# Allegro board PMOD2BNCSIMPLE_v1_06_65mil_cheap.brd
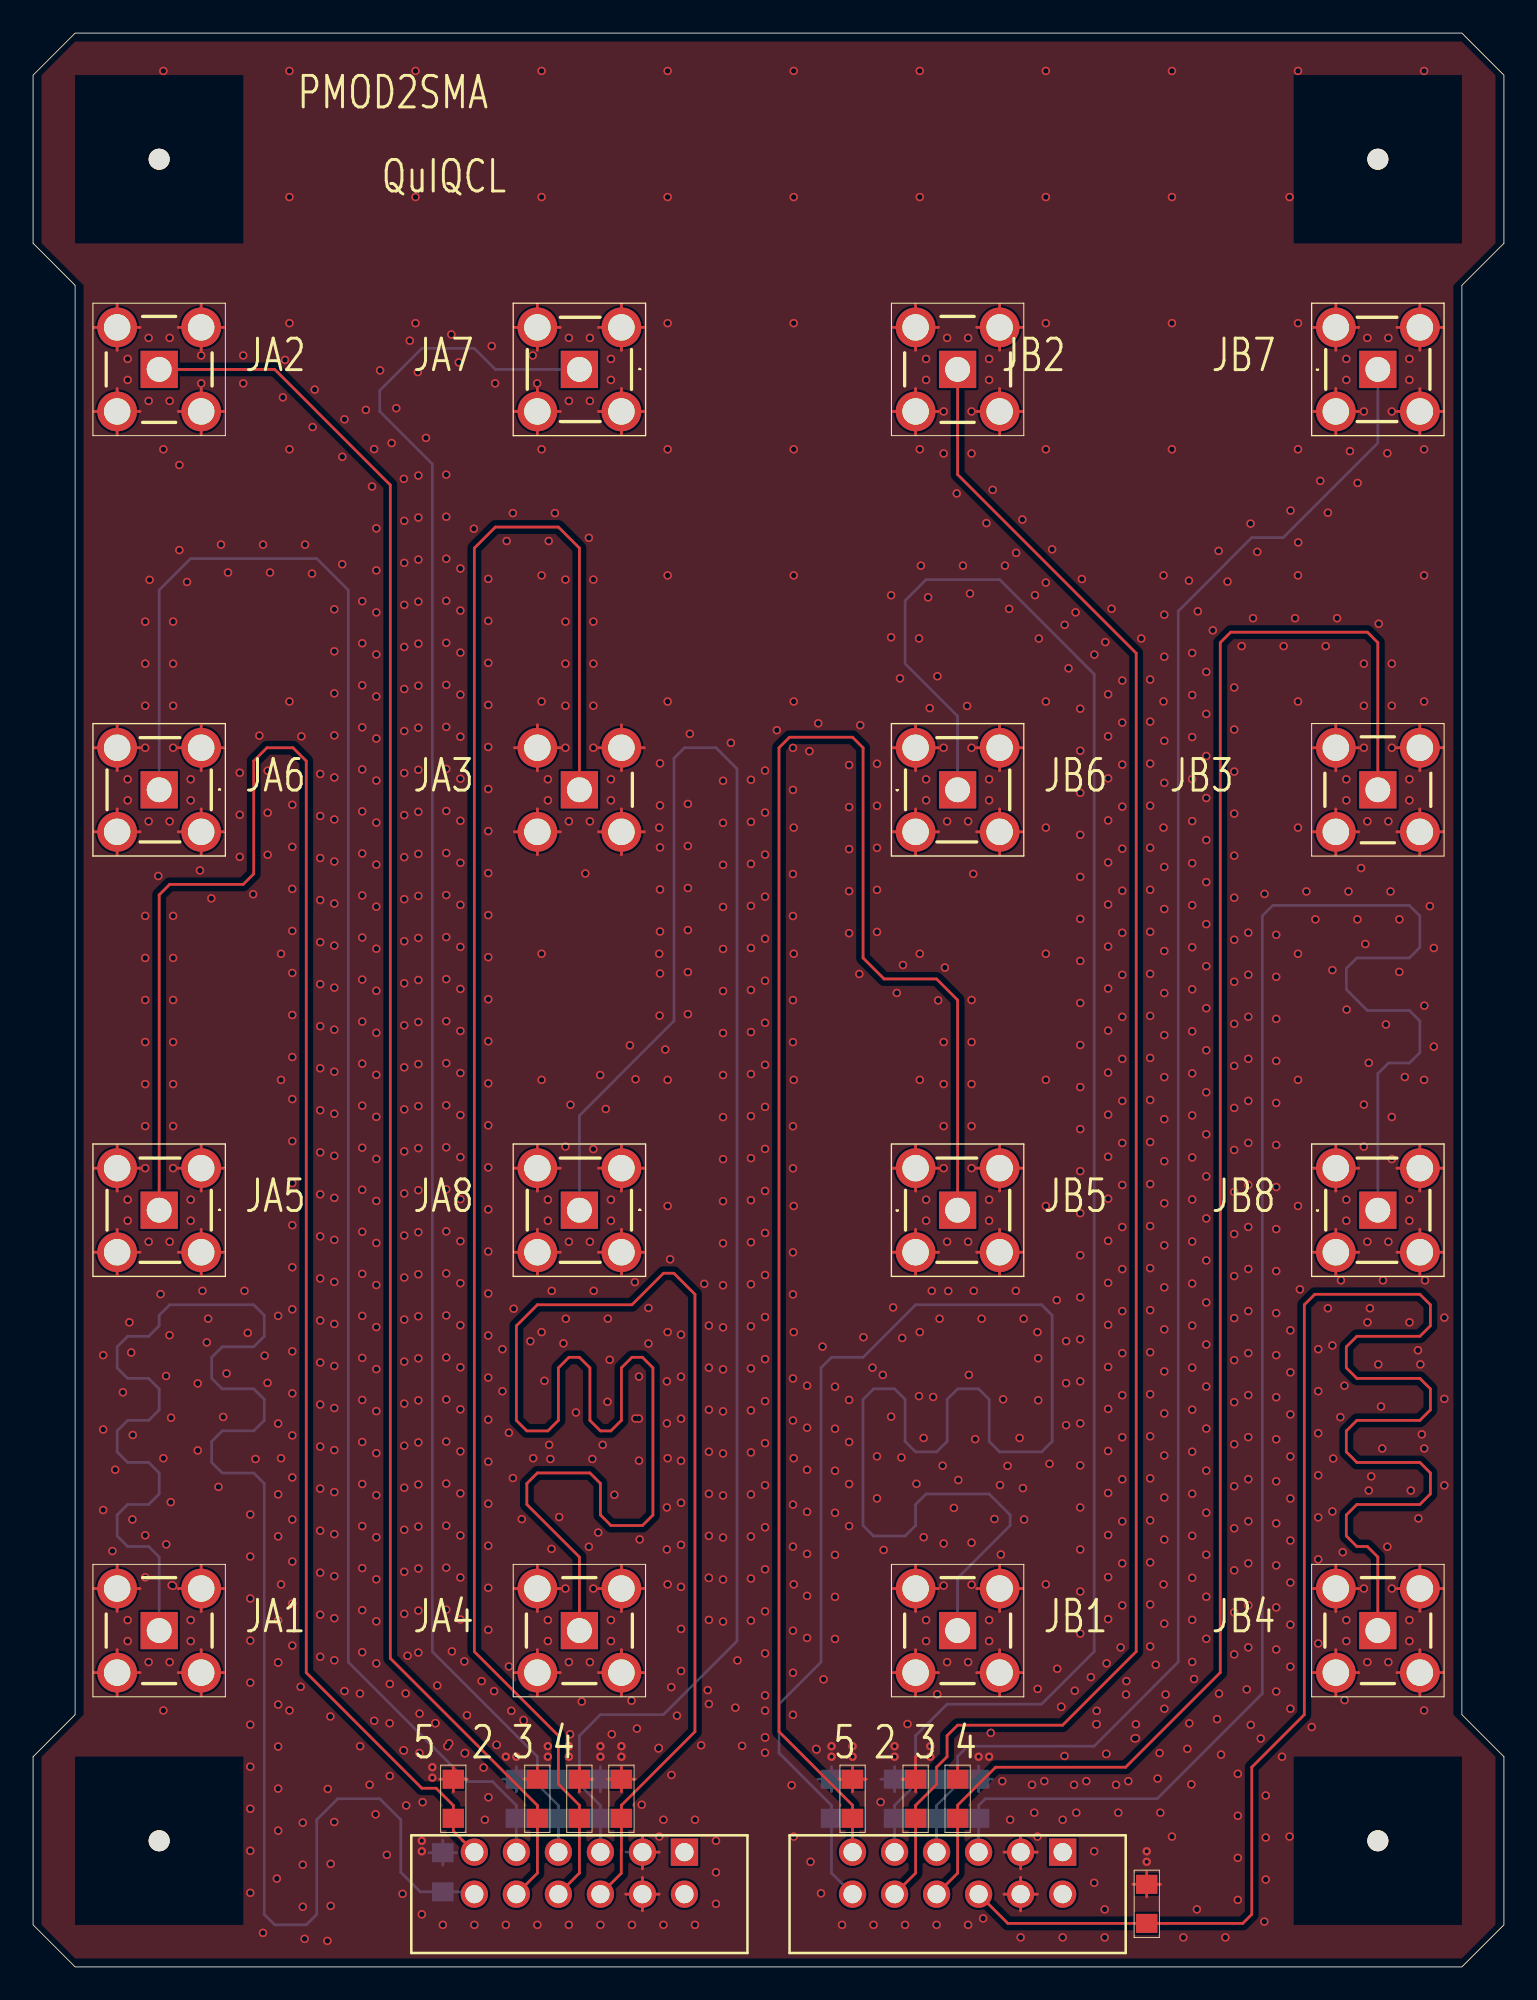
[diagram p0: board, top side]
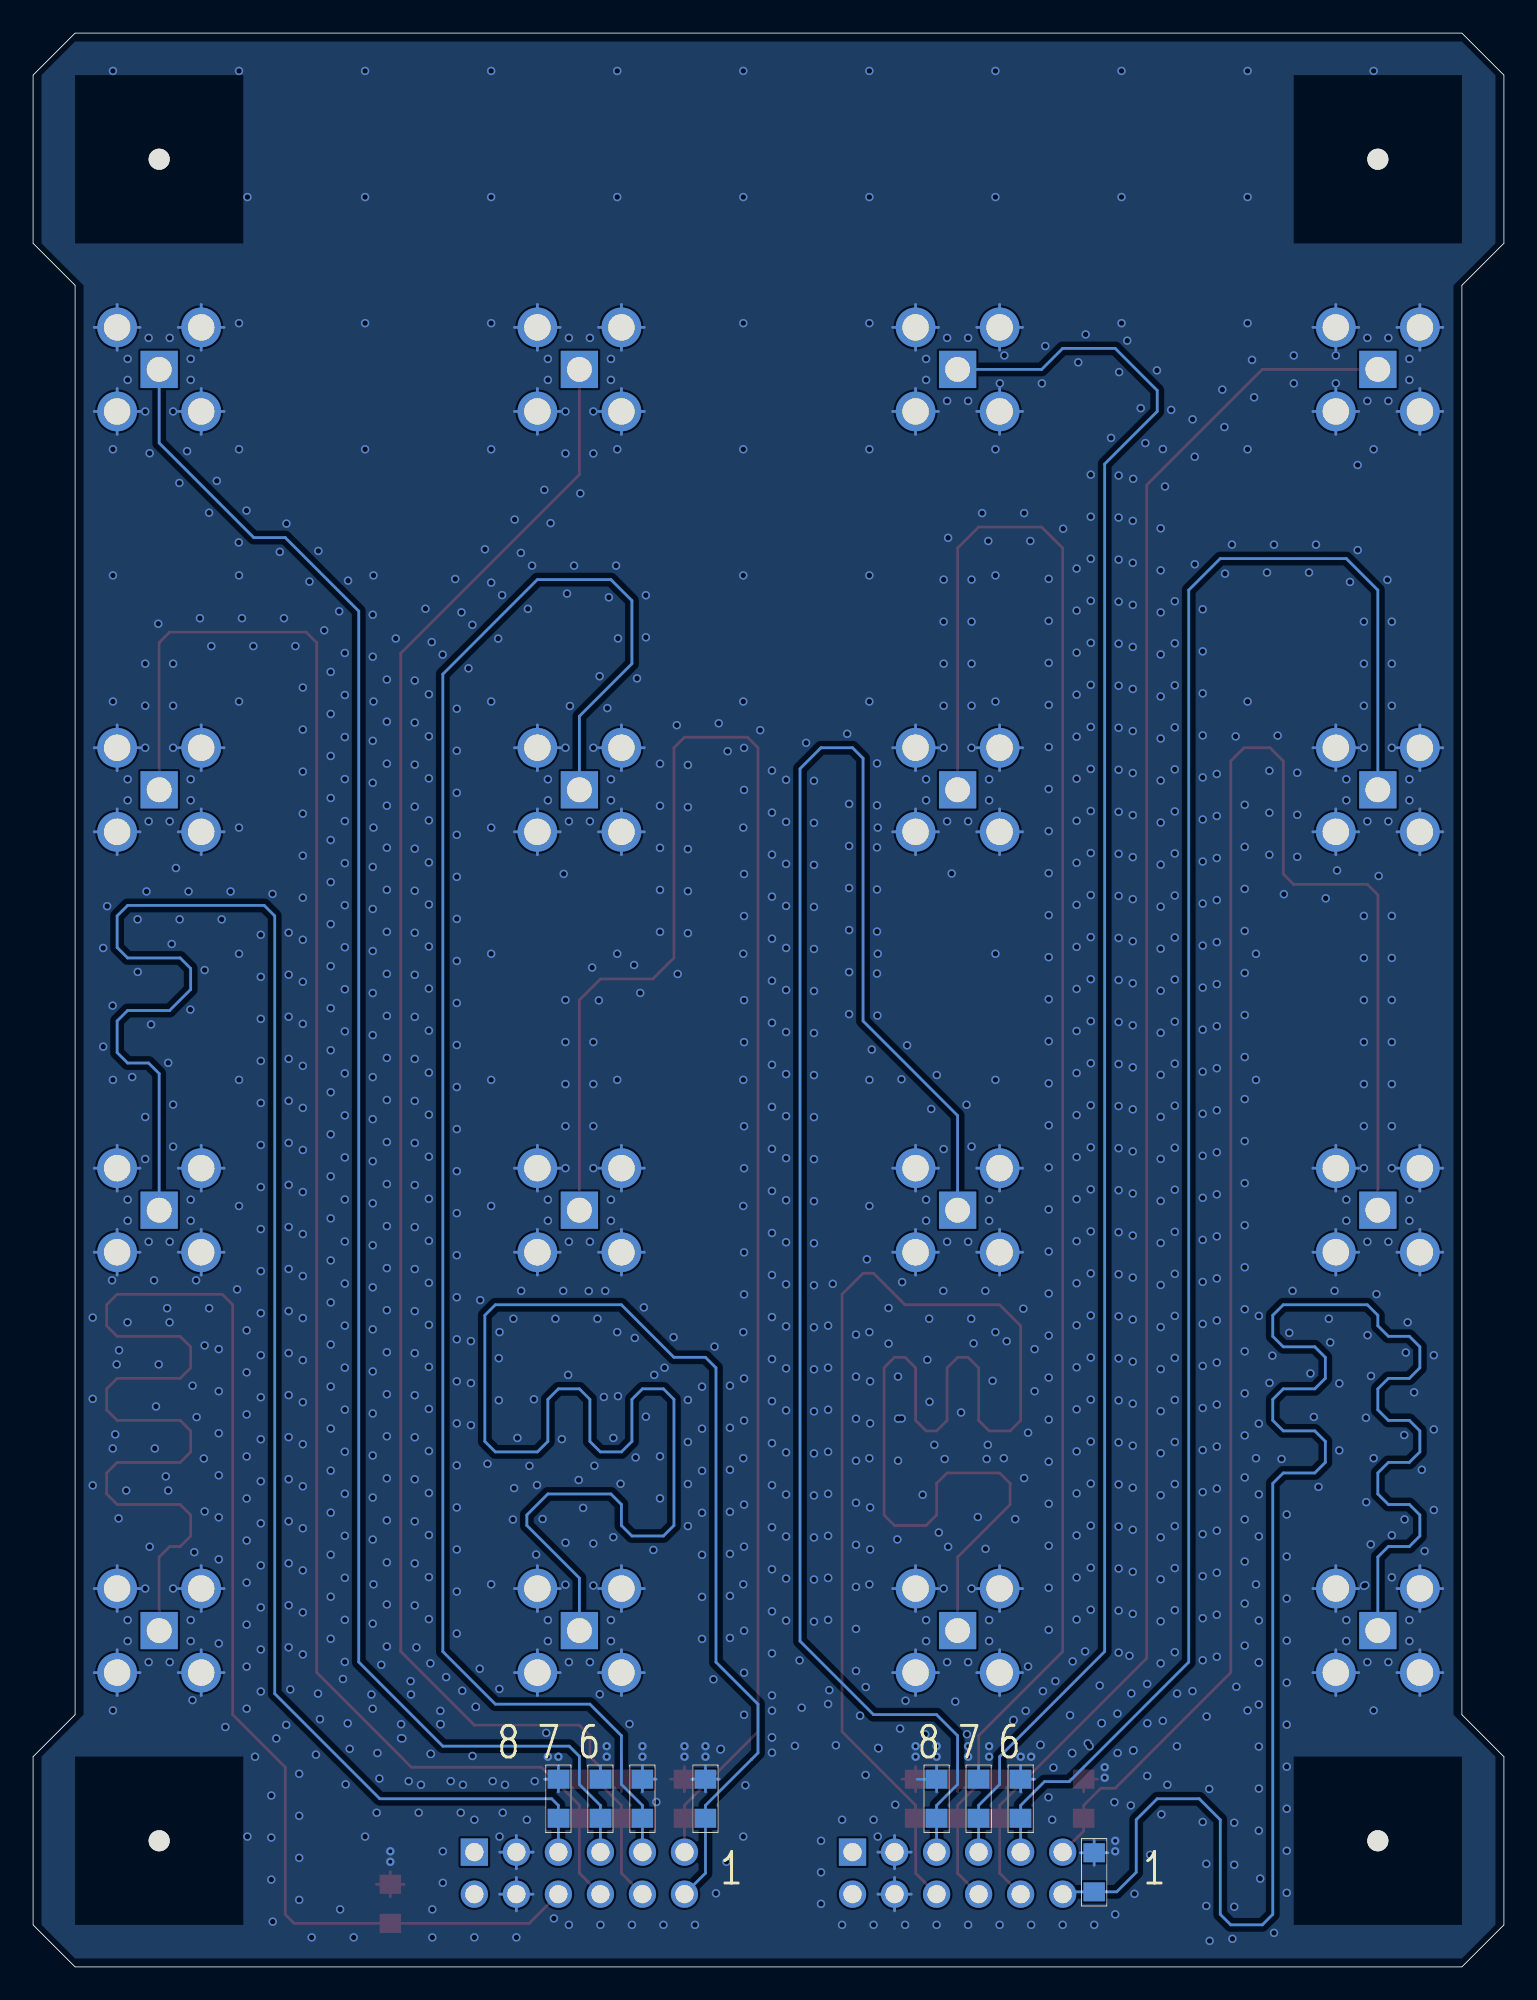
[diagram p1: board, bottom side, seen from below]

Outline 88.9 x 116.84 mm; copper layers: TOP, GND1, GND2, BOTTOM. Coordinates in mm from the lower left corner of the outline.
Outline path: 0,114.3 0,104.14 2.54,101.6 2.54,15.24 0,12.7 0,2.54 2.54,0 86.36,0 88.9,2.54 88.9,12.7 86.36,15.24 86.36,101.6 88.9,104.14 88.9,114.3 86.36,116.84 2.54,116.84 0,114.3

## Design rules (mm)
nets with their own width: min track width 0.165; nets GND N17882 N17894 N17906 N17918 N17930 N17948 N17973 N17998 N19655 N19661 N19667 N19673 N19679 N19687 N19697 N19707

## Placement (name value [footprint] x y rotation side)
J1  71764_0114  [717640112]  22.86 0.84 180 top
J2  71764_0114  [717640112]  45.72 0.84 180 top
NOREF  -  [unnamed]  81.28 109.22 0 top
NOREF#2  -  [unnamed]  7.62 7.62 0 top
NOREF#3  -  [unnamed]  81.28 7.62 0 top
NOREF#4  -  [unnamed]  7.62 109.22 0 top
R1  -  [RES_0805]  34.29 10.16 90 bottom
R2  -  [RES_0805]  31.75 10.16 90 bottom
R3  -  [RES_0805]  29.21 10.16 90 bottom
R4  -  [RES_0805]  25.4 10.16 90 top
R5  -  [RES_0805]  24.77 5.71 90 bottom
R6  -  [RES_0805]  30.48 10.16 90 top
R7  -  [RES_0805]  33.02 10.16 90 top
R8  -  [RES_0805]  35.56 10.16 90 top
R9  -  [RES_0805]  57.15 10.16 90 bottom
R10  -  [RES_0805]  54.61 10.16 90 bottom
R11  -  [RES_0805]  52.07 10.16 90 bottom
R12  -  [RES_0805]  49.53 10.16 90 top
R13  -  [RES_0805]  48.26 10.16 90 bottom
R14  -  [RES_0805]  53.34 10.16 90 top
R15  -  [RES_0805]  55.88 10.16 90 top
R16  -  [RES_0805]  67.31 3.81 90 top
U1  -  [SMA-R-RA]  7.62 45.72 180 top
U2  -  [SMAFST_PCBN]  7.62 20.32 180 top
U3  -  [SMA-R-RA]  7.62 71.12 180 top
U4  -  [SMAFST_PCBN]  7.62 96.52 180 top
U5  -  [SMA-R-RA]  33.02 96.52 180 top
U6  -  [SMAFST_PCBN]  33.02 71.12 180 top
U7  -  [SMA-R-RA]  33.02 45.72 180 top
U8  -  [SMAFST_PCBN]  33.02 20.32 180 top
U9  -  [SMA-R-RA]  55.88 45.72 0 top
U10  -  [SMAFST_PCBN]  55.88 20.32 180 top
U11  -  [SMA-R-RA]  55.88 71.12 0 top
U12  -  [SMAFST_PCBN]  55.88 96.52 180 top
U13  -  [SMA-R-RA]  81.28 96.52 0 top
U14  -  [SMAFST_PCBN]  81.28 71.12 180 top
U15  -  [SMA-R-RA]  81.28 45.72 0 top
U16  -  [SMAFST_PCBN]  81.28 20.32 180 top

## Library data of the parts
J1 J2 = 71764_0114
R1-R3 R5-R16 = RES_0805
R4 = RES_0805: signal model: resistorPack_850
U1 U3 U5 U7 U9 U11 U13 U15 = SMA-R-RA
U2 U4 U6 U8 U10 U12 U14 U16 = SMAFST_PCBN

## Footprints (pads in the part's own frame, mm; a bottom-side part is the same pattern mirrored in y, then rotated)
717640112
  rect 1.651x1.651 hole 1.1: 1(-16.51,-6.096)
  round 1.651 hole 1.1: 2(-16.51,-3.556) 3(-13.97,-6.096) 4(-13.97,-3.556) 5(-11.43,-6.096) 6(-11.43,-3.556) 7(-8.89,-6.096) 8(-8.89,-3.556) 9(-6.35,-6.096) 10(-6.35,-3.556) 11(-3.81,-6.096) 12(-3.81,-3.556)
RES_0805
  rect 1.151x1.3 smd: 1(1.181,0) 2(-1.181,0)
SMA-R-RA
  rect 2.25x2.25 hole 1.501: 1(0,0)
  round 2.4 hole 1.6: 2(-2.54,2.54) 3(-2.54,-2.54) 4(2.54,-2.54) 5(2.54,2.54)
SMAFST_PCBN
  rect 2.25x2.25 hole 1.501: 1(0,0)
  round 2.4 hole 1.6: 2(-2.54,-2.54) 3(2.54,-2.54) 4(2.54,2.54) 5(-2.54,2.54)
unnamed
  round 1.27 hole 6.35 unplated: (0,0)

## Nets
GND: J1.3 J1.4 J2.3 J2.4 R1.1 R2.1 R3.1 R4.1 R5.1 R6.1 R7.1 R8.1 R9.1 R10.1 R11.1 R12.1 R13.1 R14.1 R15.1 R16.1 U1.2 U1.3 U1.4 U1.5 U2.2 U2.3 U2.4 U2.5 U3.2 U3.3 U3.4 U3.5 U4.2 U4.3 U4.4 U4.5 U5.2 U5.3 U5.4 U5.5 U6.2 U6.3 U6.4 U6.5 U7.2 U7.3 U7.4 U7.5 U8.2 U8.3 U8.4 U8.5 U9.2 U9.3 U9.4 U9.5 U10.2 U10.3 U10.4 U10.5 U11.2 U11.3 U11.4 U11.5 U12.2 U12.3 U12.4 U12.5 U13.2 U13.3 U13.4 U13.5 U14.2 U14.3 U14.4 U14.5 U15.2 U15.3 U15.4 U15.5 U16.2 U16.3 U16.4 U16.5
N17882: J1.11 R4.2 U1.1
N17894: J1.9 R3.2 U3.1
N17906: J1.7 R2.2 U5.1
N17918: J1.5 R1.2 U7.1
N17930: J1.12 R5.2 U2.1
N17948: J1.10 R6.2 U4.1
N17973: J1.8 R7.2 U6.1
N17998: J1.6 R8.2 U8.1
N19655: J2.11 R12.2 U9.1
N19661: J2.9 R11.2 U11.1
N19667: J2.7 R10.2 U13.1
N19673: J2.5 R9.2 U15.1
N19679: J2.12 R13.2 U10.1
N19687: J2.10 R14.2 U12.1
N19697: J2.8 R15.2 U14.1
N19707: J2.6 R16.2 U16.1

Pads without a net: J1 1 2; J2 1 2

## Via types
v1: diameter 0.508, hole 0.33, TOP to BOTTOM, 1386 vias
v2: diameter 0.508, hole 0.254, TOP to BOTTOM, 26 vias

## Routing (per net, layer and track width the routed paths; a pad name or vN(x,y) marks a point on that pad's centre or on a via; arc(x,y) is an arc through that point)
GND: length 1519.1
  TOP w0.165: U1.4 6.46,48.26 ; U1.4 3.7,48.26 ; U1.4 5.08,46.88 ; U1.4 5.08,49.64 ; U5.3 36.94,99.06 ; U5.3 35.56,97.68 ; U5.3 34.18,99.06 ; U5.3 35.56,100.44 ; 5.08,97.68 U4.3 ; U4.3 3.7,99.06 ; U4.3 5.08,100.44 ; U4.3 6.46,99.06 ; 58.68,6.93 J2.3 ; J2.3 59.69,5.93 ; J2.3 59.69,7.94 ; J2.3 60.7,6.93 ; 30.48,41.8 U7.5 ; U7.5 31.86,43.18 ; U7.5 30.48,44.56 ; U7.5 29.1,43.18 ; 36.83,5.93 J1.3 ; J1.3 37.84,6.93 ; J1.3 36.83,7.94 ; 30.48,92.6 U5.5 ; U5.5 30.48,95.36 ; U5.5 31.86,93.98 ; U5.5 29.1,93.98 ; U10.3 54.72,22.86 ; U10.3 51.96,22.86 ; U10.3 53.34,21.48 ; U10.3 53.34,24.24 ; U16.2 85.2,22.86 ; U16.2 82.44,22.86 ; U16.2 83.82,24.24 ; U16.2 83.82,21.48 ; U12.5 59.8,93.98 ; U12.5 57.04,93.98 ; U12.5 58.42,95.36 ; U12.5 58.42,92.6 ; 53.34,10.58 R14.1 ; R14.1 53.34,12.7 ; R14.1 52.51,11.34 ; 5.08,21.48 U2.3 ; U2.3 3.7,22.86 ; U2.3 5.08,24.24 ; U2.3 6.46,22.86 ; 5.08,72.28 U3.4 ; U3.4 6.46,73.66 ; U3.4 3.7,73.66 ; U3.4 5.08,75.04 ; U5.4 30.48,100.44 ; U5.4 29.1,99.06 ; U5.4 31.86,99.06 ; U5.4 30.48,97.68 ; 35.56,67.2 U6.5 ; U6.5 36.94,68.58 ; U6.5 35.56,69.96 ; U6.5 34.18,68.58 ; U1.5 6.46,43.18 ; U1.5 3.7,43.18 ; U1.5 5.08,44.56 ; U1.5 5.08,41.8 ; 57.04,48.26 U9.5 ; U9.5 59.8,48.26 ; U9.5 58.42,49.64 ; U9.5 58.42,46.88 ; U12.3 54.72,99.06 ; U12.3 53.34,97.68 ; U12.3 53.34,100.44 ; U12.3 51.96,99.06 ; 35.56,41.8 U7.2 ; U7.2 35.56,44.56 ; U7.2 34.18,43.18 ; U7.2 36.94,43.18 ; 3.7,68.58 U3.5 ; U3.5 6.46,68.58 ; U3.5 5.08,69.96 ; U3.5 5.08,67.2 ; 53.34,41.8 U9.3 ; U9.3 53.34,44.56 ; U9.3 54.72,43.18 ; U9.3 51.96,43.18 ; U11.4 58.42,69.96 ; U11.4 57.04,68.58 ; U11.4 58.42,67.2 ; U11.4 59.8,68.58 ; 25.4,10.58 R4.1 ; R4.1 25.4,12.1 ; R4.1 24.57,11.34 ; R4.1 26.23,11.34 ; 78.74,92.6 U13.3 ; U13.3 80.12,93.98 ; U13.3 78.74,95.36 ; U13.3 77.36,93.98 ; R12.1 50.36,11.34 ; R12.1 48.7,11.34 ; R12.1 49.53,12.1 ; R12.1 49.53,10.58 ; 82.44,48.26 U15.5 ; U15.5 83.82,49.64 ; U15.5 83.82,46.88 ; U15.5 85.2,48.26 ; 83.82,67.2 U14.5 ; U14.5 82.44,68.58 ; U14.5 83.82,69.96 ; U14.5 85.2,68.58 ; U8.3 31.86,22.86 ; U8.3 30.48,21.48 ; U8.3 30.48,24.24 ; U8.3 29.1,22.86 ; 8.78,68.58 U3.2 ; U3.2 11.54,68.58 ; U3.2 10.16,67.2 ; U3.2 10.16,69.96 ; U13.4 83.82,95.36 ; U13.4 83.82,92.6 ; U13.4 85.2,93.98 ; U13.4 82.44,93.98 ; U14.2 83.82,75.04 ; U14.2 85.2,73.66 ; U14.2 82.44,73.66 ; U14.2 83.82,72.28 ; 57.04,73.66 U11.5 ; U11.5 58.42,75.04 ; U11.5 59.8,73.66 ; U11.5 58.42,72.28 ; 30.48,72.28 U6.3 ; U6.3 30.48,75.04 ; U6.3 31.86,73.66 ; U6.3 29.1,73.66 ; U7.4 31.86,48.26 ; U7.4 30.48,46.88 ; U7.4 30.48,49.64 ; U7.4 29.1,48.26 ; U4.4 6.46,93.98 ; U4.4 5.08,95.36 ; U4.4 5.08,92.6 ; U4.4 3.7,93.98 ; 57.04,43.18 U9.4 ; U9.4 59.8,43.18 ; U9.4 58.42,41.8 ; U9.4 58.42,44.56 ; U16.5 85.2,17.78 ; U16.5 83.82,16.4 ; U16.5 83.82,19.16 ; U16.5 82.44,17.78 ; 10.16,72.28 U3.3 ; U3.3 10.16,75.04 ; U3.3 11.54,73.66 ; U3.3 8.78,73.66 ; U15.3 78.74,44.56 ; U15.3 78.74,41.8 ; U15.3 77.36,43.18 ; U15.3 80.12,43.18 ; 77.36,22.86 U16.3 ; U16.3 80.12,22.86 ; U16.3 78.74,24.24 ; U16.3 78.74,21.48 ; 58.68,4.39 J2.4 ; J2.4 60.7,4.39 ; J2.4 59.69,5.4 ; J2.4 59.69,3.39 ; U8.4 31.86,17.78 ; U8.4 30.48,19.16 ; U8.4 29.1,17.78 ; U8.4 30.48,16.4 ; U6.2 36.94,73.66 ; U6.2 35.56,75.04 ; U6.2 35.56,72.28 ; U6.2 34.18,73.66 ; 35.56,46.88 U7.3 ; U7.3 34.18,48.26 ; U7.3 35.56,49.64 ; U7.3 36.94,48.26 ; 67.31,4.23 R16.1 ; R16.1 68.14,4.99 ; R16.1 66.48,4.99 ; R16.1 67.31,5.75 ; 53.34,72.28 U11.2 ; U11.2 54.72,73.66 ; U11.2 51.96,73.66 ; U11.2 53.34,75.04 ; 77.36,99.06 U13.2 ; U13.2 78.74,100.44 ; U13.2 78.74,97.68 ; U13.2 80.12,99.06 ; J1.4 36.83,5.4 ; J1.4 35.82,4.39 ; J1.4 37.84,4.39 ; J1.4 36.83,3.39 ; U15.4 85.2,43.18 ; U15.4 82.44,43.18 ; U15.4 83.82,44.56 ; U15.4 83.82,41.8 ; 57.04,17.78 U10.5 ; U10.5 59.8,17.78 ; U10.5 58.42,16.4 ; U10.5 58.42,19.16 ; U15.2 80.12,48.26 ; U15.2 77.36,48.26 ; U15.2 78.74,49.64 ; U15.2 78.74,46.88 ; U1.3 10.16,49.64 ; U1.3 8.78,48.26 ; U1.3 10.16,46.88 ; U1.3 11.54,48.26 ; U14.4 78.74,69.96 ; U14.4 78.74,67.2 ; U14.4 77.36,68.58 ; U14.4 80.12,68.58 ; U12.4 54.72,93.98 ; U12.4 53.34,95.36 ; U12.4 51.96,93.98 ; U12.4 53.34,92.6 ; U4.5 10.16,95.36 ; U4.5 8.78,93.98 ; U4.5 11.54,93.98 ; U4.5 10.16,92.6 ; 58.42,21.48 U10.2 ; U10.2 59.8,22.86 ; U10.2 58.42,24.24 ; U10.2 57.04,22.86 ; U2.2 11.54,22.86 ; U2.2 8.78,22.86 ; U2.2 10.16,21.48 ; U2.2 10.16,24.24 ; 3.7,17.78 U2.4 ; U2.4 6.46,17.78 ; U2.4 5.08,19.16 ; U2.4 5.08,16.4 ; 35.56,92.6 U5.2 ; U5.2 35.56,95.36 ; U5.2 36.94,93.98 ; U5.2 34.18,93.98 ; U13.5 83.82,100.44 ; U13.5 82.44,99.06 ; U13.5 85.2,99.06 ; U13.5 83.82,97.68 ; 34.73,11.34 R8.1 ; R8.1 36.39,11.34 ; R8.1 35.56,12.1 ; R8.1 35.56,10.58 ; 8.78,99.06 U4.2 ; U4.2 10.16,100.44 ; U4.2 11.54,99.06 ; U4.2 10.16,97.68 ; 51.96,48.26 U9.2 ; U9.2 54.72,48.26 ; U9.2 53.34,46.88 ; U9.2 53.34,49.64 ; 33.02,10.58 R7.1 ; R7.1 33.02,12.1 ; R7.1 33.85,11.34 ; R15.1 55.88,12.13 ; U2.5 11.54,17.78 ; U2.5 10.16,16.4 ; U2.5 10.16,19.16 ; U2.5 8.78,17.78 ; U6.4 31.86,68.58 ; U6.4 30.48,67.2 ; U6.4 30.48,69.96 ; U6.4 29.1,68.58 ; U8.2 35.56,24.24 ; U8.2 36.94,22.86 ; U8.2 35.56,21.48 ; U8.2 34.18,22.86 ; 10.16,41.8 U1.2 ; U1.2 8.78,43.18 ; U1.2 11.54,43.18 ; U1.2 10.16,44.56 ; 51.96,68.58 U11.3 ; U11.3 54.72,68.58 ; U11.3 53.34,69.96 ; U11.3 53.34,67.2 ; 53.34,16.4 U10.4 ; U10.4 54.72,17.78 ; U10.4 53.34,19.16 ; U10.4 51.96,17.78 ; 77.36,17.78 U16.4 ; U16.4 80.12,17.78 ; U16.4 78.74,19.16 ; U16.4 78.74,16.4 ; U14.3 80.12,73.66 ; U14.3 77.36,73.66 ; U14.3 78.74,75.04 ; U14.3 78.74,72.28 ; U12.2 58.42,100.44 ; U12.2 59.8,99.06 ; U12.2 58.42,97.68 ; U12.2 57.04,99.06 ; 35.56,16.4 U8.5 ; U8.5 35.56,19.16 ; U8.5 36.94,17.78 ; U8.5 34.18,17.78 ; 30.48,12.1 R6.1 29.65,11.34
  GND1 w0.165: 58.42,67.2 U11.4 ; U11.4 57.04,68.58 ; U11.4 59.8,68.58 ; U11.4 58.42,69.96 ; U13.5 83.82,100.44 ; U13.5 82.44,99.06 ; U13.5 83.82,97.68 ; U13.5 85.2,99.06 ; 29.1,73.66 U6.3 ; U6.3 30.48,75.04 ; U6.3 30.48,72.28 ; U6.3 31.86,73.66 ; U9.5 59.8,48.26 ; U9.5 57.04,48.26 ; U9.5 58.42,46.88 ; U9.5 58.42,49.64 ; U8.2 36.94,22.86 ; U8.2 35.56,21.48 ; U8.2 35.56,24.24 ; U8.2 34.18,22.86 ; U2.5 10.16,19.16 ; U2.5 11.54,17.78 ; U2.5 8.78,17.78 ; U2.5 10.16,16.4 ; 5.08,92.6 U4.4 ; U4.4 5.08,95.36 ; U4.4 3.7,93.98 ; U4.4 6.46,93.98 ; 35.56,41.8 U7.2 ; U7.2 34.18,43.18 ; U7.2 35.56,44.56 ; U7.2 36.94,43.18 ; U16.5 83.82,19.16 ; U16.5 82.44,17.78 ; U16.5 85.2,17.78 ; U16.5 83.82,16.4 ; U3.3 11.54,73.66 ; U3.3 8.78,73.66 ; U3.3 10.16,72.28 ; U3.3 10.16,75.04 ; 35.56,97.68 U5.3 ; U5.3 34.18,99.06 ; U5.3 35.56,100.44 ; U5.3 36.94,99.06 ; J2.4 60.7,4.39 ; J2.4 59.69,3.39 ; J2.4 58.68,4.39 ; J2.4 59.69,5.4 ; 30.48,97.68 U5.4 ; U5.4 31.86,99.06 ; U5.4 29.1,99.06 ; U5.4 30.48,100.44 ; 82.44,68.58 U14.5 ; U14.5 85.2,68.58 ; U14.5 83.82,69.96 ; U14.5 83.82,67.2 ; U3.4 5.08,75.04 ; U3.4 5.08,72.28 ; U3.4 6.46,73.66 ; U3.4 3.7,73.66 ; 82.44,22.86 U16.2 ; U16.2 85.2,22.86 ; U16.2 83.82,21.48 ; U16.2 83.82,24.24 ; 82.44,48.26 U15.5 ; U15.5 83.82,49.64 ; U15.5 83.82,46.88 ; U15.5 85.2,48.26 ; U8.3 30.48,24.24 ; U8.3 29.1,22.86 ; U8.3 31.86,22.86 ; U8.3 30.48,21.48 ; 53.34,67.2 U11.3 ; U11.3 51.96,68.58 ; U11.3 53.34,69.96 ; U11.3 54.72,68.58 ; 78.74,41.8 U15.3 ; U15.3 78.74,44.56 ; U15.3 77.36,43.18 ; U15.3 80.12,43.18 ; U10.2 58.42,24.24 ; U10.2 58.42,21.48 ; U10.2 57.04,22.86 ; U10.2 59.8,22.86 ; U11.2 54.72,73.66 ; U11.2 53.34,72.28 ; U11.2 51.96,73.66 ; U11.2 53.34,75.04 ; 59.69,5.93 J2.3 ; J2.3 59.69,7.94 ; J2.3 58.68,6.93 ; J2.3 60.7,6.93 ; 53.34,16.4 U10.4 ; U10.4 53.34,19.16 ; U10.4 54.72,17.78 ; U10.4 51.96,17.78 ; U5.5 31.86,93.98 ; U5.5 30.48,95.36 ; U5.5 29.1,93.98 ; U5.5 30.48,92.6 ; 51.96,48.26 U9.2 ; U9.2 54.72,48.26 ; U9.2 53.34,46.88 ; U9.2 53.34,49.64 ; U7.5 30.48,44.56 ; U7.5 29.1,43.18 ; U7.5 31.86,43.18 ; U7.5 30.48,41.8 ; U6.4 31.86,68.58 ; U6.4 30.48,69.96 ; U6.4 29.1,68.58 ; U6.4 30.48,67.2 ; 78.74,92.6 U13.3 ; U13.3 77.36,93.98 ; U13.3 78.74,95.36 ; U13.3 80.12,93.98 ; 10.16,97.68 U4.2 ; U4.2 8.78,99.06 ; U4.2 10.16,100.44 ; U4.2 11.54,99.06 ; 57.04,93.98 U12.5 ; U12.5 59.8,93.98 ; U12.5 58.42,92.6 ; U12.5 58.42,95.36 ; U3.2 11.54,68.58 ; U3.2 10.16,67.2 ; U3.2 8.78,68.58 ; U3.2 10.16,69.96 ; 35.82,4.39 J1.4 ; J1.4 37.84,4.39 ; J1.4 36.83,5.4 ; J1.4 36.83,3.39 ; U3.5 6.46,68.58 ; U3.5 3.7,68.58 ; U3.5 5.08,67.2 ; U3.5 5.08,69.96 ; 83.82,72.28 U14.2 ; U14.2 83.82,75.04 ; U14.2 82.44,73.66 ; U14.2 85.2,73.66 ; 58.42,72.28 U11.5 ; U11.5 58.42,75.04 ; U11.5 59.8,73.66 ; U11.5 57.04,73.66 ; U13.4 85.2,93.98 ; U13.4 83.82,95.36 ; U13.4 82.44,93.98 ; U13.4 83.82,92.6 ; U13.2 80.12,99.06 ; U13.2 78.74,97.68 ; U13.2 78.74,100.44 ; U13.2 77.36,99.06 ; U12.2 59.8,99.06 ; U12.2 58.42,100.44 ; U12.2 57.04,99.06 ; U12.2 58.42,97.68 ; 5.08,21.48 U2.3 ; U2.3 5.08,24.24 ; U2.3 3.7,22.86 ; U2.3 6.46,22.86 ; U1.2 11.54,43.18 ; U1.2 10.16,41.8 ; U1.2 10.16,44.56 ; U1.2 8.78,43.18 ; U15.2 78.74,49.64 ; U15.2 77.36,48.26 ; U15.2 80.12,48.26 ; U15.2 78.74,46.88 ; U16.4 80.12,17.78 ; U16.4 78.74,19.16 ; U16.4 78.74,16.4 ; U16.4 77.36,17.78 ; 3.7,99.06 U4.3 ; U4.3 5.08,100.44 ; U4.3 5.08,97.68 ; U4.3 6.46,99.06 ; 29.1,17.78 U8.4 ; U8.4 31.86,17.78 ; U8.4 30.48,19.16 ; U8.4 30.48,16.4 ; 34.18,93.98 U5.2 ; U5.2 35.56,95.36 ; U5.2 36.94,93.98 ; U5.2 35.56,92.6 ; 51.96,43.18 U9.3 ; U9.3 53.34,44.56 ; U9.3 54.72,43.18 ; U9.3 53.34,41.8 ; U14.3 80.12,73.66 ; U14.3 77.36,73.66 ; U14.3 78.74,72.28 ; U14.3 78.74,75.04 ; U8.5 36.94,17.78 ; U8.5 35.56,16.4 ; U8.5 35.56,19.16 ; U8.5 34.18,17.78 ; 57.04,43.18 U9.4 ; U9.4 59.8,43.18 ; U9.4 58.42,44.56 ; U9.4 58.42,41.8 ; 8.78,48.26 U1.3 ; U1.3 10.16,46.88 ; U1.3 11.54,48.26 ; U1.3 10.16,49.64 ; U7.4 30.48,49.64 ; U7.4 29.1,48.26 ; U7.4 31.86,48.26 ; U7.4 30.48,46.88 ; 78.74,21.48 U16.3 ; U16.3 80.12,22.86 ; U16.3 78.74,24.24 ; U16.3 77.36,22.86 ; 58.42,16.4 U10.5 ; U10.5 59.8,17.78 ; U10.5 58.42,19.16 ; U10.5 57.04,17.78 ; 35.56,46.88 U7.3 ; U7.3 36.94,48.26 ; U7.3 35.56,49.64 ; U7.3 34.18,48.26 ; 82.44,43.18 U15.4 ; U15.4 83.82,44.56 ; U15.4 83.82,41.8 ; U15.4 85.2,43.18 ; U4.5 11.54,93.98 ; U4.5 10.16,95.36 ; U4.5 10.16,92.6 ; U4.5 8.78,93.98 ; 5.08,46.88 U1.4 ; U1.4 5.08,49.64 ; U1.4 3.7,48.26 ; U1.4 6.46,48.26 ; U12.3 54.72,99.06 ; U12.3 53.34,100.44 ; U12.3 51.96,99.06 ; U12.3 53.34,97.68 ; U14.4 80.12,68.58 ; U14.4 78.74,67.2 ; U14.4 78.74,69.96 ; U14.4 77.36,68.58 ; 35.82,6.93 J1.3 ; J1.3 36.83,5.93 ; J1.3 37.84,6.93 ; J1.3 36.83,7.94 ; 34.18,73.66 U6.2 ; U6.2 36.94,73.66 ; U6.2 35.56,72.28 ; U6.2 35.56,75.04 ; 5.08,16.4 U2.4 ; U2.4 3.7,17.78 ; U2.4 6.46,17.78 ; U2.4 5.08,19.16 ; 53.34,21.48 U10.3 ; U10.3 53.34,24.24 ; U10.3 54.72,22.86 ; U10.3 51.96,22.86 ; 51.96,93.98 U12.4 ; U12.4 54.72,93.98 ; U12.4 53.34,95.36 ; U12.4 53.34,92.6 ; U6.5 35.56,69.96 ; U6.5 36.94,68.58 ; U6.5 34.18,68.58 ; U6.5 35.56,67.2 ; 3.7,43.18 U1.5 ; U1.5 6.46,43.18 ; U1.5 5.08,41.8 ; U1.5 5.08,44.56 ; 8.78,22.86 U2.2 ; U2.2 10.16,24.24 ; U2.2 10.16,21.48 ; U2.2 11.54,22.86
  GND2 w0.165: J2.3 59.69,7.94 ; J2.3 59.69,5.93 ; J2.3 60.7,6.93 ; J2.3 58.68,6.93 ; U3.4 6.46,73.66 ; U3.4 3.7,73.66 ; U3.4 5.08,75.04 ; U3.4 5.08,72.28 ; 3.7,68.58 U3.5 ; U3.5 5.08,69.96 ; U3.5 5.08,67.2 ; U3.5 6.46,68.58 ; U1.5 6.46,43.18 ; U1.5 5.08,41.8 ; U1.5 3.7,43.18 ; U1.5 5.08,44.56 ; U5.4 30.48,100.44 ; U5.4 29.1,99.06 ; U5.4 31.86,99.06 ; U5.4 30.48,97.68 ; U8.5 35.56,19.16 ; U8.5 35.56,16.4 ; U8.5 36.94,17.78 ; U8.5 34.18,17.78 ; J1.4 36.83,5.4 ; J1.4 35.82,4.39 ; J1.4 36.83,3.39 ; J1.4 37.84,4.39 ; 34.18,93.98 U5.2 ; U5.2 35.56,95.36 ; U5.2 35.56,92.6 ; U5.2 36.94,93.98 ; U14.5 83.82,69.96 ; U14.5 83.82,67.2 ; U14.5 85.2,68.58 ; U14.5 82.44,68.58 ; U16.5 85.2,17.78 ; U16.5 82.44,17.78 ; U16.5 83.82,16.4 ; U16.5 83.82,19.16 ; 78.74,16.4 U16.4 ; U16.4 77.36,17.78 ; U16.4 80.12,17.78 ; U16.4 78.74,19.16 ; U4.3 5.08,100.44 ; U4.3 5.08,97.68 ; U4.3 6.46,99.06 ; U4.3 3.7,99.06 ; 82.44,48.26 U15.5 ; U15.5 85.2,48.26 ; U15.5 83.82,46.88 ; U15.5 83.82,49.64 ; 58.42,21.48 U10.2 ; U10.2 58.42,24.24 ; U10.2 59.8,22.86 ; U10.2 57.04,22.86 ; 35.56,21.48 U8.2 ; U8.2 36.94,22.86 ; U8.2 34.18,22.86 ; U8.2 35.56,24.24 ; U15.4 85.2,43.18 ; U15.4 83.82,41.8 ; U15.4 82.44,43.18 ; U15.4 83.82,44.56 ; 29.1,48.26 U7.4 ; U7.4 31.86,48.26 ; U7.4 30.48,46.88 ; U7.4 30.48,49.64 ; U16.2 83.82,24.24 ; U16.2 82.44,22.86 ; U16.2 85.2,22.86 ; U16.2 83.82,21.48 ; 53.34,21.48 U10.3 ; U10.3 53.34,24.24 ; U10.3 51.96,22.86 ; U10.3 54.72,22.86 ; 78.74,67.2 U14.4 ; U14.4 78.74,69.96 ; U14.4 77.36,68.58 ; U14.4 80.12,68.58 ; 53.34,41.8 U9.3 ; U9.3 53.34,44.56 ; U9.3 51.96,43.18 ; U9.3 54.72,43.18 ; U6.4 31.86,68.58 ; U6.4 30.48,69.96 ; U6.4 30.48,67.2 ; U6.4 29.1,68.58 ; 53.34,97.68 U12.3 ; U12.3 53.34,100.44 ; U12.3 54.72,99.06 ; U12.3 51.96,99.06 ; U6.2 35.56,75.04 ; U6.2 36.94,73.66 ; U6.2 35.56,72.28 ; U6.2 34.18,73.66 ; U13.3 80.12,93.98 ; U13.3 78.74,95.36 ; U13.3 77.36,93.98 ; U13.3 78.74,92.6 ; 3.7,22.86 U2.3 ; U2.3 5.08,24.24 ; U2.3 5.08,21.48 ; U2.3 6.46,22.86 ; U15.2 80.12,48.26 ; U15.2 77.36,48.26 ; U15.2 78.74,46.88 ; U15.2 78.74,49.64 ; 35.56,41.8 U7.2 ; U7.2 35.56,44.56 ; U7.2 36.94,43.18 ; U7.2 34.18,43.18 ; 78.74,41.8 U15.3 ; U15.3 80.12,43.18 ; U15.3 77.36,43.18 ; U15.3 78.74,44.56 ; U1.2 11.54,43.18 ; U1.2 10.16,44.56 ; U1.2 10.16,41.8 ; U1.2 8.78,43.18 ; U3.2 10.16,69.96 ; U3.2 10.16,67.2 ; U3.2 8.78,68.58 ; U3.2 11.54,68.58 ; 29.1,22.86 U8.3 ; U8.3 30.48,21.48 ; U8.3 30.48,24.24 ; U8.3 31.86,22.86 ; 77.36,22.86 U16.3 ; U16.3 78.74,21.48 ; U16.3 78.74,24.24 ; U16.3 80.12,22.86 ; 51.96,48.26 U9.2 ; U9.2 54.72,48.26 ; U9.2 53.34,49.64 ; U9.2 53.34,46.88 ; 78.74,72.28 U14.3 ; U14.3 78.74,75.04 ; U14.3 77.36,73.66 ; U14.3 80.12,73.66 ; 53.34,92.6 U12.4 ; U12.4 51.96,93.98 ; U12.4 53.34,95.36 ; U12.4 54.72,93.98 ; U5.5 31.86,93.98 ; U5.5 30.48,92.6 ; U5.5 30.48,95.36 ; U5.5 29.1,93.98 ; U11.5 58.42,75.04 ; U11.5 57.04,73.66 ; U11.5 58.42,72.28 ; U11.5 59.8,73.66 ; U2.4 6.46,17.78 ; U2.4 3.7,17.78 ; U2.4 5.08,16.4 ; U2.4 5.08,19.16 ; 57.04,48.26 U9.5 ; U9.5 58.42,49.64 ; U9.5 58.42,46.88 ; U9.5 59.8,48.26 ; U5.3 36.94,99.06 ; U5.3 35.56,97.68 ; U5.3 35.56,100.44 ; U5.3 34.18,99.06 ; U4.4 6.46,93.98 ; U4.4 5.08,92.6 ; U4.4 5.08,95.36 ; U4.4 3.7,93.98 ; 30.48,41.8 U7.5 ; U7.5 31.86,43.18 ; U7.5 29.1,43.18 ; U7.5 30.48,44.56 ; 8.78,22.86 U2.2 ; U2.2 10.16,21.48 ; U2.2 10.16,24.24 ; U2.2 11.54,22.86 ; U2.5 11.54,17.78 ; U2.5 10.16,16.4 ; U2.5 10.16,19.16 ; U2.5 8.78,17.78 ; J1.3 36.83,7.94 ; J1.3 35.82,6.93 ; J1.3 36.83,5.93 ; J1.3 37.84,6.93 ; 5.08,46.88 U1.4 ; U1.4 6.46,48.26 ; U1.4 3.7,48.26 ; U1.4 5.08,49.64 ; 57.04,68.58 U11.4 ; U11.4 58.42,69.96 ; U11.4 58.42,67.2 ; U11.4 59.8,68.58 ; 53.34,16.4 U10.4 ; U10.4 53.34,19.16 ; U10.4 51.96,17.78 ; U10.4 54.72,17.78 ; 10.16,72.28 U3.3 ; U3.3 11.54,73.66 ; U3.3 10.16,75.04 ; U3.3 8.78,73.66 ; 58.68,4.39 J2.4 ; J2.4 59.69,3.39 ; J2.4 60.7,4.39 ; J2.4 59.69,5.4 ; 82.44,99.06 U13.5 ; U13.5 83.82,97.68 ; U13.5 83.82,100.44 ; U13.5 85.2,99.06 ; U4.2 10.16,100.44 ; U4.2 10.16,97.68 ; U4.2 8.78,99.06 ; U4.2 11.54,99.06 ; 58.42,41.8 U9.4 ; U9.4 59.8,43.18 ; U9.4 57.04,43.18 ; U9.4 58.42,44.56 ; U14.2 85.2,73.66 ; U14.2 82.44,73.66 ; U14.2 83.82,75.04 ; U14.2 83.82,72.28 ; 8.78,93.98 U4.5 ; U4.5 10.16,95.36 ; U4.5 11.54,93.98 ; U4.5 10.16,92.6 ; U12.2 59.8,99.06 ; U12.2 58.42,100.44 ; U12.2 58.42,97.68 ; U12.2 57.04,99.06 ; U6.5 36.94,68.58 ; U6.5 34.18,68.58 ; U6.5 35.56,69.96 ; U6.5 35.56,67.2 ; U13.4 83.82,95.36 ; U13.4 83.82,92.6 ; U13.4 82.44,93.98 ; U13.4 85.2,93.98 ; U6.3 30.48,75.04 ; U6.3 29.1,73.66 ; U6.3 31.86,73.66 ; U6.3 30.48,72.28 ; U8.4 30.48,19.16 ; U8.4 31.86,17.78 ; U8.4 29.1,17.78 ; U8.4 30.48,16.4 ; U13.2 80.12,99.06 ; U13.2 78.74,100.44 ; U13.2 77.36,99.06 ; U13.2 78.74,97.68 ; U11.2 53.34,75.04 ; U11.2 51.96,73.66 ; U11.2 54.72,73.66 ; U11.2 53.34,72.28 ; 51.96,68.58 U11.3 ; U11.3 54.72,68.58 ; U11.3 53.34,67.2 ; U11.3 53.34,69.96 ; U12.5 59.8,93.98 ; U12.5 58.42,95.36 ; U12.5 58.42,92.6 ; U12.5 57.04,93.98 ; 58.42,16.4 U10.5 ; U10.5 59.8,17.78 ; U10.5 57.04,17.78 ; U10.5 58.42,19.16 ; 8.78,48.26 U1.3 ; U1.3 10.16,46.88 ; U1.3 10.16,49.64 ; U1.3 11.54,48.26 ; 34.18,48.26 U7.3 ; U7.3 35.56,46.88 ; U7.3 35.56,49.64 ; U7.3 36.94,48.26
  BOTTOM w0.165: 58.68,6.93 J2.3 ; J2.3 60.7,6.93 ; J2.3 59.69,7.94 ; J2.3 59.69,5.93 ; U14.3 80.12,73.66 ; U14.3 78.74,72.28 ; U14.3 77.36,73.66 ; U14.3 78.74,75.04 ; U3.2 10.16,69.96 ; U3.2 8.78,68.58 ; U3.2 11.54,68.58 ; U3.2 10.16,67.2 ; 77.36,43.18 U15.3 ; U15.3 78.74,44.56 ; U15.3 78.74,41.8 ; U15.3 80.12,43.18 ; U5.4 30.48,100.44 ; U5.4 30.48,97.68 ; U5.4 31.86,99.06 ; U5.4 29.1,99.06 ; U3.5 5.08,69.96 ; U3.5 3.7,68.58 ; U3.5 6.46,68.58 ; U3.5 5.08,67.2 ; 82.44,99.06 U13.5 ; U13.5 83.82,100.44 ; U13.5 83.82,97.68 ; U13.5 85.2,99.06 ; U16.5 83.82,19.16 ; U16.5 83.82,16.4 ; U16.5 85.2,17.78 ; U16.5 82.44,17.78 ; U10.3 54.72,22.86 ; U10.3 51.96,22.86 ; U10.3 53.34,24.24 ; U10.3 53.34,21.48 ; U1.2 10.16,44.56 ; U1.2 10.16,41.8 ; U1.2 11.54,43.18 ; U1.2 8.78,43.18 ; U3.4 6.46,73.66 ; U3.4 5.08,75.04 ; U3.4 5.08,72.28 ; U3.4 3.7,73.66 ; 82.44,48.26 U15.5 ; U15.5 83.82,46.88 ; U15.5 83.82,49.64 ; U15.5 85.2,48.26 ; 51.96,68.58 U11.3 ; U11.3 53.34,69.96 ; U11.3 54.72,68.58 ; U11.3 53.34,67.2 ; U4.4 6.46,93.98 ; U4.4 5.08,95.36 ; U4.4 5.08,92.6 ; U4.4 3.7,93.98 ; 5.08,41.8 U1.5 ; U1.5 3.7,43.18 ; U1.5 6.46,43.18 ; U1.5 5.08,44.56 ; U11.5 59.8,73.66 ; U11.5 57.04,73.66 ; U11.5 58.42,72.28 ; U11.5 58.42,75.04 ; U4.3 5.08,100.44 ; U4.3 5.08,97.68 ; U4.3 6.46,99.06 ; U4.3 3.7,99.06 ; 77.36,93.98 U13.3 ; U13.3 78.74,92.6 ; U13.3 80.12,93.98 ; U13.3 78.74,95.36 ; U15.2 80.12,48.26 ; U15.2 78.74,46.88 ; U15.2 77.36,48.26 ; U15.2 78.74,49.64 ; 8.78,17.78 U2.5 ; U2.5 10.16,19.16 ; U2.5 11.54,17.78 ; U2.5 10.16,16.4 ; U9.4 58.42,44.56 ; U9.4 57.04,43.18 ; U9.4 58.42,41.8 ; U9.4 59.8,43.18 ; 35.56,72.28 U6.2 ; U6.2 36.94,73.66 ; U6.2 34.18,73.66 ; U6.2 35.56,75.04 ; U4.2 11.54,99.06 ; U4.2 10.16,100.44 ; U4.2 8.78,99.06 ; U4.2 10.16,97.68 ; U2.4 6.46,17.78 ; U2.4 3.7,17.78 ; U2.4 5.08,16.4 ; U2.4 5.08,19.16 ; U14.4 78.74,69.96 ; U14.4 80.12,68.58 ; U14.4 78.74,67.2 ; U14.4 77.36,68.58 ; R9.1 57.98,11.34 ; R9.1 57.15,12.13 ; R9.1 57.15,10.58 ; U12.3 53.34,100.44 ; U12.3 54.72,99.06 ; U12.3 51.96,99.06 ; U12.3 53.34,97.68 ; 30.48,46.88 U7.4 ; U7.4 30.48,49.64 ; U7.4 31.86,48.26 ; U7.4 29.1,48.26 ; U5.2 35.56,95.36 ; U5.2 34.18,93.98 ; U5.2 35.56,92.6 ; U5.2 36.94,93.98 ; U5.5 31.86,93.98 ; U5.5 30.48,95.36 ; U5.5 29.1,93.98 ; U5.5 30.48,92.6 ; U12.5 58.42,95.36 ; U12.5 57.04,93.98 ; U12.5 59.8,93.98 ; U12.5 58.42,92.6 ; U9.5 58.42,49.64 ; U9.5 57.04,48.26 ; U9.5 59.8,48.26 ; U9.5 58.42,46.88 ; 51.96,48.26 U9.2 ; U9.2 53.34,49.64 ; U9.2 53.34,46.88 ; U9.2 54.72,48.26 ; U3.3 11.54,73.66 ; U3.3 10.16,75.04 ; U3.3 8.78,73.66 ; U3.3 10.16,72.28 ; 35.82,6.93 J1.3 ; J1.3 37.84,6.93 ; J1.3 36.83,7.94 ; J1.3 36.83,5.93 ; 51.96,43.18 U9.3 ; U9.3 54.72,43.18 ; U9.3 53.34,44.56 ; U9.3 53.34,41.8 ; U8.2 35.56,24.24 ; U8.2 36.94,22.86 ; U8.2 35.56,21.48 ; U8.2 34.18,22.86 ; 29.1,17.78 U8.4 ; U8.4 30.48,16.4 ; U8.4 31.86,17.78 ; U8.4 30.48,19.16 ; 82.44,43.18 U15.4 ; U15.4 83.82,41.8 ; U15.4 83.82,44.56 ; U15.4 85.2,43.18 ; U8.3 30.48,24.24 ; U8.3 30.48,21.48 ; U8.3 29.1,22.86 ; U8.3 31.86,22.86 ; U7.5 31.86,43.18 ; U7.5 30.48,41.8 ; U7.5 29.1,43.18 ; U7.5 30.48,44.56 ; 10.16,46.88 U1.3 ; U1.3 11.54,48.26 ; U1.3 10.16,49.64 ; U1.3 8.78,48.26 ; 36.83,3.39 J1.4 ; J1.4 37.84,4.39 ; J1.4 35.82,4.39 ; J1.4 36.83,5.4 ; U6.3 31.86,73.66 ; U6.3 30.48,75.04 ; U6.3 30.48,72.28 ; U6.3 29.1,73.66 ; 35.56,46.88 U7.3 ; U7.3 36.94,48.26 ; U7.3 35.56,49.64 ; U7.3 34.18,48.26 ; U14.2 85.2,73.66 ; U14.2 83.82,75.04 ; U14.2 83.82,72.28 ; U14.2 82.44,73.66 ; J2.4 59.69,5.4 ; J2.4 58.68,4.39 ; J2.4 60.7,4.39 ; J2.4 59.69,3.39 ; U14.5 83.82,69.96 ; U14.5 83.82,67.2 ; U14.5 82.44,68.58 ; U14.5 85.2,68.58 ; U10.2 58.42,24.24 ; U10.2 59.8,22.86 ; U10.2 57.04,22.86 ; U10.2 58.42,21.48 ; 83.82,92.6 U13.4 ; U13.4 85.2,93.98 ; U13.4 83.82,95.36 ; U13.4 82.44,93.98 ; R13.1 49.09,11.34 ; R13.1 48.26,12.1 ; R13.1 48.26,10.58 ; R13.1 47.43,11.34 ; U4.5 11.54,93.98 ; U4.5 10.16,95.36 ; U4.5 10.16,92.6 ; U4.5 8.78,93.98 ; U12.2 59.8,99.06 ; U12.2 57.04,99.06 ; U12.2 58.42,100.44 ; U12.2 58.42,97.68 ; 57.04,68.58 U11.4 ; U11.4 58.42,67.2 ; U11.4 59.8,68.58 ; U11.4 58.42,69.96 ; 23.93,6.9 R5.1 ; R5.1 24.77,6.14 ; R5.1 25.6,6.9 ; R5.1 24.77,7.66 ; 34.18,99.06 U5.3 ; U5.3 36.94,99.06 ; U5.3 35.56,97.68 ; U5.3 35.56,100.44 ; U6.5 36.94,68.58 ; U6.5 35.56,67.2 ; U6.5 34.18,68.58 ; U6.5 35.56,69.96 ; 5.08,46.88 U1.4 ; U1.4 3.7,48.26 ; U1.4 5.08,49.64 ; U1.4 6.46,48.26 ; 51.96,73.66 U11.2 ; U11.2 53.34,75.04 ; U11.2 54.72,73.66 ; U11.2 53.34,72.28 ; U16.3 78.74,24.24 ; U16.3 78.74,21.48 ; U16.3 77.36,22.86 ; U16.3 80.12,22.86 ; 10.16,21.48 U2.2 ; U2.2 11.54,22.86 ; U2.2 8.78,22.86 ; U2.2 10.16,24.24 ; U10.5 59.8,17.78 ; U10.5 58.42,19.16 ; U10.5 57.04,17.78 ; U10.5 58.42,16.4 ; U10.4 53.34,19.16 ; U10.4 53.34,16.4 ; U10.4 51.96,17.78 ; U10.4 54.72,17.78 ; U8.5 35.56,19.16 ; U8.5 36.94,17.78 ; U8.5 35.56,16.4 ; U8.5 34.18,17.78 ; 28.38,11.34 R3.1 ; R3.1 29.21,10.58 ; R3.1 29.21,12.1 ; 5.08,21.48 U2.3 ; U2.3 6.46,22.86 ; U2.3 5.08,24.24 ; U2.3 3.7,22.86 ; U13.2 78.74,100.44 ; U13.2 78.74,97.68 ; U13.2 77.36,99.06 ; U13.2 80.12,99.06 ; R1.1 34.29,12.1 ; R1.1 35.47,11.34 ; R1.1 34.29,10.58 ; 30.48,67.2 U6.4 ; U6.4 31.86,68.58 ; U6.4 29.1,68.58 ; U6.4 30.48,69.96 ; 34.18,43.18 U7.2 ; U7.2 35.56,41.8 ; U7.2 36.94,43.18 ; U7.2 35.56,44.56 ; U12.4 53.34,95.36 ; U12.4 54.72,93.98 ; U12.4 53.34,92.6 ; U12.4 51.96,93.98 ; U16.4 78.74,19.16 ; U16.4 80.12,17.78 ; U16.4 77.36,17.78 ; U16.4 78.74,16.4 ; U16.2 83.82,24.24 ; U16.2 83.82,21.48 ; U16.2 82.44,22.86 ; U16.2 85.2,22.86 ; 51.24,11.34 R11.1 ; R11.1 52.07,10.58 ; R11.1 52.07,12.1 ; R10.1 54.61,12.1 ; R2.1 31.75,12.1
  vias: v1(4.24,36.96) v1(4.24,32.47) v1(4.24,27.6) v1(4.79,25.13) v1(4.96,30.04) v1(5.43,34.72) v1(5.71,97.16) v1(5.71,95.89) v1(5.71,71.75) v1(5.71,70.48) v1(5.71,46.35) v1(5.71,45.09) v1(5.71,20.95) v1(5.71,19.68) v1(5.82,38.94) v1(5.93,37.12) v1(6,27.04) v1(6.02,32.14) v1(6.78,81.28) v1(6.78,78.74) v1(6.78,76.2) v1(6.78,73.66) v1(6.78,63.5) v1(6.78,60.96) v1(6.78,58.42) v1(6.78,55.88) v1(6.78,53.34) v1(6.78,50.8) v1(6.78,48.26) v1(6.78,26.08) v1(6.78,23.54) v1(6.99,98.42) v1(6.99,94.61) v1(6.99,69.22) v1(6.99,43.81) v1(6.99,18.41) v1(7.04,83.8) v1(7.57,65.91) v1(7.7,40.65) v1(7.87,114.55) v1(7.87,91.69) v1(7.87,30.73) v1(7.87,15.49) v1(8.04,35.7) v1(8.05,25.53) v1(8.26,98.42) v1(8.26,94.61) v1(8.26,69.22) v1(8.26,43.81) v1(8.24,38.17) v1(8.26,18.41) v1(8.34,33.18) v1(8.32,28.08) v1(8.38,23.06) v1(8.46,81.28) v1(8.46,78.74) v1(8.46,76.2) v1(8.46,73.66) v1(8.46,63.5) v1(8.46,60.96) v1(8.46,58.42) v1(8.46,55.88) v1(8.46,53.34) v1(8.46,50.8) v1(8.46,48.26) v1(8.46,23.02) v1(8.84,90.74) v1(8.84,85.6) v1(9.3,83.68) v1(9.53,71.75) v1(9.53,70.48) v1(9.53,46.35) v1(9.53,45.09) v1(9.53,20.95) v1(9.53,19.68) v1(9.95,35.25) v1(9.95,31.21) v1(10.09,66.25) v1(10.16,97.36) v1(10.16,95.68) v1(10.24,40.85) v1(10.5,37.73) v1(10.58,39.16) v1(10.77,64.56) v1(11.21,29) v1(11.36,85.93) v1(11.49,33.23) v1(11.69,35.85) v1(11.78,84.25) v1(12.49,72.15) v1(12.49,69.61) v1(12.49,67.07) v1(12.7,97.36) v1(12.7,95.68) v1(12.78,40.85) v1(12.97,38.31) v1(13.13,27.34) v1(13.13,24.8) v1(13.13,22.26) v1(13.13,19.72) v1(13.13,17.18) v1(13.13,14.64) v1(13.13,12.1) v1(13.13,9.56) v1(13.13,7.02) v1(13.13,4.48) v1(13.3,64.81) v1(13.44,30.69) v1(13.68,74.39) v1(13.9,85.93) v1(13.9,2.05) v1(14,36.93) v1(14.18,72.27) v1(14.18,69.73) v1(14.18,67.19) v1(14.17,35.28) v1(14.32,84.25) v1(14.73,5.33) v1(14.81,39.33) v1(14.81,32.83) v1(14.81,28.55) v1(14.81,26.01) v1(14.81,20.93) v1(14.81,18.39) v1(14.81,18.39) v1(14.81,15.85) v1(14.81,13.31) v1(14.81,10.77) v1(14.81,8.23) v1(14.99,61.21) v1(14.99,53.59) v1(14.99,30.73) v1(14.99,23.11) v1(15.1,94.83) v1(15.22,97.09) v1(15.49,114.55) v1(15.49,106.93) v1(15.49,99.31) v1(15.49,91.69) v1(15.49,76.45) v1(15.49,15.49) v1(15.67,70.21) v1(15.67,67.67) v1(15.67,65.13) v1(15.67,62.59) v1(15.67,60.05) v1(15.67,57.51) v1(15.67,54.97) v1(15.67,52.43) v1(15.67,49.89) v1(15.67,47.35) v1(15.67,44.81) v1(15.67,42.27) v1(15.67,39.73) v1(15.67,37.19) v1(15.67,34.65) v1(15.67,32.11) v1(15.67,29.57) v1(15.67,27.03) v1(15.67,24.49) v1(15.67,21.95) v1(15.67,19.41) v1(16.17,16.92) v1(16.22,74.35) v1(16.3,8.71) v1(16.3,6.17) v1(16.3,3.63) v1(16.44,85.93) v1(16.41,1.7) v1(16.89,93.04) v1(16.86,84.18) v1(17.02,95.3) v1(17.35,72.08) v1(17.35,69.54) v1(17.35,67) v1(17.35,64.46) v1(17.35,61.92) v1(17.35,59.38) v1(17.35,56.84) v1(17.35,54.3) v1(17.35,51.76) v1(17.35,49.22) v1(17.35,46.68) v1(17.35,44.14) v1(17.35,41.6) v1(17.35,39.06) v1(17.35,36.52) v1(17.35,33.98) v1(17.35,31.44) v1(17.35,28.9) v1(17.35,26.36) v1(17.35,23.82) v1(17.35,21.28) v1(17.35,18.74) v1(17.79,1.57) v1(17.81,10.75) v1(17.97,15.13) v1(17.99,6.23) v1(17.99,3.69) v1(18.21,82.03) v1(18.21,79.49) v1(18.21,76.95) v1(18.21,74.41) v1(18.21,71.87) v1(18.21,69.33) v1(18.21,66.79) v1(18.21,64.25) v1(18.21,61.71) v1(18.21,59.17) v1(18.21,56.63) v1(18.21,54.09) v1(18.21,51.55) v1(18.21,49.01) v1(18.21,46.47) v1(18.21,43.93) v1(18.21,41.39) v1(18.21,38.85) v1(18.21,36.31) v1(18.21,33.77) v1(18.21,31.23) v1(18.21,28.69) v1(18.21,26.15) v1(18.21,23.61) v1(18.21,21.07) v1(18.21,18.53) v1(18.2,8.76) v1(18.69,91.24) v1(18.68,84.75) v1(18.82,93.5) v1(18.82,16.66) v1(19.76,16.52) v1(19.76,13.33) v1(19.89,82.51) v1(19.89,79.97) v1(19.89,77.43) v1(19.89,74.89) v1(19.89,72.35) v1(19.89,69.81) v1(19.89,67.27) v1(19.89,64.73) v1(19.89,62.19) v1(19.89,59.65) v1(19.89,57.11) v1(19.89,54.57) v1(19.89,52.03) v1(19.89,49.49) v1(19.89,46.95) v1(19.89,44.41) v1(19.89,41.87) v1(19.89,39.33) v1(19.89,36.79) v1(19.89,34.25) v1(19.89,31.71) v1(19.89,29.17) v1(19.89,26.63) v1(19.89,24.09) v1(19.89,21.55) v1(19.89,19.01) v1(20.11,94.07) v1(20.34,11) v1(20.49,89.45) v1(20.61,91.71) v1(20.62,14.87) v1(20.7,9.22) v1(20.75,86.92) v1(20.75,84.38) v1(20.75,81.84) v1(20.75,79.3) v1(20.75,76.76) v1(20.75,74.22) v1(20.75,71.68) v1(20.75,69.14) v1(20.75,66.6) v1(20.75,64.06) v1(20.75,61.52) v1(20.75,58.98) v1(20.75,56.44) v1(20.75,53.9) v1(20.75,51.36) v1(20.75,48.82) v1(20.75,46.28) v1(20.75,43.74) v1(20.75,41.2) v1(20.75,38.66) v1(20.75,36.12) v1(20.75,33.58) v1(20.75,31.04) v1(20.75,28.5) v1(20.75,25.96) v1(20.75,23.42) v1(20.75,20.88) v1(20.75,18.34) v1(20.97,96.46) v1(21.38,6.77) v1(21.56,17.1) v1(21.55,14.72) v1(21.56,11.54) v1(21.67,92.07) v1(21.95,94.18) v1(22.39,13.09) v1(22.33,4.41) v1(22.41,89.91) v1(22.43,87.37) v1(22.43,84.83) v1(22.43,82.29) v1(22.43,79.75) v1(22.43,77.21) v1(22.43,74.67) v1(22.43,72.13) v1(22.43,69.59) v1(22.43,67.05) v1(22.43,64.51) v1(22.43,61.97) v1(22.43,59.43) v1(22.43,56.89) v1(22.43,54.35) v1(22.43,51.81) v1(22.43,49.27) v1(22.43,46.73) v1(22.43,44.19) v1(22.43,41.65) v1(22.43,39.11) v1(22.43,36.57) v1(22.43,34.03) v1(22.43,31.49) v1(22.43,28.95) v1(22.43,26.41) v1(22.43,23.87) v1(22.43,21.33) v1(22.41,13.07) v1(22.52,16.52) v1(22.55,9.76) v1(22.63,18.8) v1(22.77,98.26) v1(23.11,114.55) v1(23.11,106.93) v1(23.11,99.31) v1(23.26,96.36) v1(23.29,90.11) v1(23.29,87.57) v1(23.29,85.03) v1(23.29,82.49) v1(23.29,79.95) v1(23.29,77.41) v1(23.29,74.87) v1(23.29,72.33) v1(23.29,69.79) v1(23.29,67.25) v1(23.29,64.71) v1(23.29,62.17) v1(23.29,59.63) v1(23.29,57.09) v1(23.29,54.55) v1(23.29,52.01) v1(23.29,49.47) v1(23.29,46.93) v1(23.29,44.39) v1(23.29,41.85) v1(23.29,39.31) v1(23.29,36.77) v1(23.29,34.23) v1(23.29,31.69) v1(23.29,29.15) v1(23.29,26.61) v1(23.29,24.07) v1(23.29,21.53) v1(23.29,18.99) v1(23.36,15.3) v1(23.35,12.92) v1(23.5,3.17) v1(23.54,9.95) v1(23.75,92.38) v1(24.32,14.73) v1(24.31,14.72) v1(24.43,17) v1(24.77,2.54) v1(24.97,90.16) v1(24.97,87.62) v1(24.97,85.08) v1(24.97,82.54) v1(24.97,80) v1(24.97,77.46) v1(24.97,74.92) v1(24.97,72.38) v1(24.97,69.84) v1(24.97,67.3) v1(24.97,64.76) v1(24.97,62.22) v1(24.97,59.68) v1(24.97,57.14) v1(24.97,54.6) v1(24.97,52.06) v1(24.97,49.52) v1(24.97,46.98) v1(24.97,44.44) v1(24.97,41.9) v1(24.97,39.36) v1(24.97,36.82) v1(24.97,34.28) v1(24.97,31.74) v1(24.97,29.2) v1(24.97,26.66) v1(24.97,24.12) v1(24.97,21.58) v1(25.04,13.33) v1(25.15,13.51) v1(25.28,98.63) v1(25.31,19.06) v1(25.73,96.95) v1(25.83,84.49) v1(25.83,81.95) v1(25.83,79.41) v1(25.83,76.87) v1(25.83,74.33) v1(25.83,71.79) v1(25.83,69.25) v1(25.83,66.71) v1(25.83,64.17) v1(25.83,61.63) v1(25.83,59.09) v1(25.83,56.55) v1(25.83,54.01) v1(25.83,51.47) v1(25.83,48.93) v1(25.83,46.39) v1(25.83,43.85) v1(25.83,41.31) v1(25.83,38.77) v1(25.83,36.23) v1(25.83,33.69) v1(25.83,31.15) v1(25.83,28.61) v1(25.83,26.07) v1(25.83,23.53) v1(25.83,20.99) v1(26.07,18.46) v1(26.09,12.91) v1(26.11,12.93) v1(26.23,15.2) v1(26.64,86.89) v1(26.67,2.54) v1(27.11,17.27) v1(27.23,12.04) v1(27.3,8.89) v1(27.51,83.87) v1(27.51,81.33) v1(27.51,78.79) v1(27.51,76.25) v1(27.51,73.71) v1(27.51,71.17) v1(27.51,68.63) v1(27.51,66.09) v1(27.51,63.55) v1(27.51,61.01) v1(27.51,58.47) v1(27.51,55.93) v1(27.51,53.39) v1(27.51,50.85) v1(27.51,48.31) v1(27.51,45.77) v1(27.51,43.23) v1(27.51,40.69) v1(27.51,38.15) v1(27.51,35.61) v1(27.51,33.07) v1(27.51,30.53) v1(27.51,27.99) v1(27.51,25.45) v1(27.51,22.91) v1(27.51,20.37) v1(27.53,10.25) v1(27.72,97.93) v1(27.86,16.66) v1(27.93,95.68) v1(28.01,13.42) v1(28.02,13.41) v1(28.37,37.32) v1(28.37,34.78) v1(28.57,2.54) v1(28.63,86.15) v1(28.76,32.27) v1(28.76,18.15) v1(28.91,15.47) v1(29,87.84) v1(29,29.54) v1(29.05,39.77) v1(29.54,27.05) v1(29.64,14.92) v1(29.66,14.87) v1(30.05,37.8) v1(30.2,97.36) v1(30.23,30.73) v1(30.47,95.68) v1(30.48,2.54) v1(30.73,114.55) v1(30.73,106.93) v1(30.73,91.69) v1(30.73,84.07) v1(30.73,76.45) v1(30.73,61.21) v1(30.73,53.59) v1(30.73,38.35) v1(30.91,35.41) v1(31.17,86.15) v1(31.11,71.75) v1(31.11,70.48) v1(31.11,46.35) v1(31.11,45.09) v1(31.19,31.54) v1(31.11,20.95) v1(31.11,19.68) v1(31.26,30.69) v1(31.35,40.85) v1(31.33,25.26) v1(31.54,87.84) v1(31.8,27.18) v1(32.05,37.67) v1(32.18,83.82) v1(32.18,81.28) v1(32.18,78.74) v1(32.18,76.2) v1(32.18,73.66) v1(32.18,49.57) v1(32.2,39.16) v1(32.18,22.86) v1(32.39,98.42) v1(32.39,94.61) v1(32.39,69.22) v1(32.39,43.81) v1(32.39,18.41) v1(32.39,2.54) v1(32.48,52.09) v1(32.46,14.06) v1(32.81,33.5) v1(33.16,16.03) v1(33.38,66.06) v1(33.59,86.34) v1(33.59,25.38) v1(33.66,98.42) v1(33.66,94.61) v1(33.66,69.22) v1(33.66,43.81) v1(33.66,18.41) v1(33.8,30.69) v1(33.86,83.82) v1(33.86,81.28) v1(33.86,78.74) v1(33.86,76.2) v1(33.86,73.66) v1(33.86,49.41) v1(33.89,40.85) v1(33.86,22.86) v1(34.16,26.24) v1(34.28,53.89) v1(34.29,2.54) v1(34.43,31.54) v1(34.62,51.84) v1(34.74,39.16) v1(34.72,34.14) v1(34.85,36.68) v1(34.92,97.16) v1(34.92,95.89) v1(34.92,71.75) v1(34.92,70.48) v1(34.92,46.35) v1(34.92,45.09) v1(34.92,20.95) v1(34.92,19.68) v1(34.98,14.06) v1(35.13,28.53) v1(36.07,55.68) v1(36.17,16.08) v1(36.2,2.54) v1(36.37,41.38) v1(36.4,33.14) v1(36.41,53.63) v1(36.5,14.4) v1(36.62,35.67) v1(36.62,33.13) v1(36.62,30.59) v1(36.66,25.83) v1(36.79,9.8) v1(37.2,39.81) v1(37.19,37.66) v1(37.8,13.2) v1(37.89,72.72) v1(37.89,70.18) v1(37.85,68.83) v1(37.89,67.64) v1(37.89,65.1) v1(37.89,62.56) v1(37.85,61.21) v1(37.89,60.02) v1(37.87,57.48) v1(37.82,13.23) v1(37.85,7.87) v1(38.1,8.89) v1(38.1,2.54) v1(38.21,55.43) v1(38.31,35.38) v1(38.31,32.84) v1(38.31,27.76) v1(38.31,25.22) v1(38.35,114.55) v1(38.35,106.93) v1(38.35,99.31) v1(38.35,91.69) v1(38.35,84.07) v1(38.35,76.45) v1(38.35,53.59) v1(38.35,45.97) v1(38.35,38.35) v1(38.35,30.73) v1(38.35,23.11) v1(38.5,42.75) v1(38.57,16.91) v1(38.58,11.6) v1(38.92,15.18) v1(39.16,38.2) v1(39.16,35.66) v1(39.16,33.12) v1(39.16,30.58) v1(39.16,28.04) v1(39.16,25.5) v1(39.16,22.96) v1(39.16,20.42) v1(39.16,17.88) v1(39.58,70.27) v1(39.58,67.73) v1(39.58,65.19) v1(39.58,62.65) v1(39.58,60.11) v1(39.58,57.57) v1(39.7,74.5) v1(40,8.89) v1(40,2.54) v1(40.38,13.39) v1(40.57,41.27) v1(40.78,16.72) v1(40.85,38.75) v1(40.85,36.21) v1(40.85,33.67) v1(40.85,31.13) v1(40.85,28.59) v1(40.85,26.05) v1(40.85,23.51) v1(40.85,23.51) v1(40.85,20.97) v1(40.85,15.89) v1(41.27,7.62) v1(41.27,5.71) v1(41.27,3.81) v1(41.7,71.66) v1(41.7,69.12) v1(41.7,66.58) v1(41.7,64.04) v1(41.7,61.5) v1(41.7,58.96) v1(41.7,56.42) v1(41.7,53.88) v1(41.7,51.34) v1(41.7,48.8) v1(41.7,46.26) v1(41.7,43.72) v1(41.7,41.18) v1(41.7,38.64) v1(41.7,36.1) v1(41.7,33.56) v1(41.7,31.02) v1(41.7,28.48) v1(41.7,25.94) v1(41.7,23.4) v1(41.7,20.86) v1(42.18,73.96) v1(42.45,15.66) v1(42.57,18.52) v1(42.85,13.36) v1(43.39,71.72) v1(43.39,69.18) v1(43.39,66.64) v1(43.39,64.1) v1(43.39,61.56) v1(43.39,59.02) v1(43.39,56.48) v1(43.39,53.94) v1(43.39,51.4) v1(43.39,48.86) v1(43.39,46.32) v1(43.39,43.78) v1(43.39,41.24) v1(43.39,38.7) v1(43.39,36.16) v1(43.39,33.62) v1(43.39,31.08) v1(43.39,28.54) v1(43.39,26) v1(43.39,23.46) v1(43.39,20.92) v1(44.24,72.28) v1(44.24,69.74) v1(44.24,67.2) v1(44.24,64.66) v1(44.24,62.12) v1(44.24,59.58) v1(44.24,57.04) v1(44.24,54.5) v1(44.24,51.96) v1(44.24,49.42) v1(44.24,46.88) v1(44.24,44.34) v1(44.24,41.8) v1(44.24,39.26) v1(44.24,36.72) v1(44.24,34.18) v1(44.24,31.64) v1(44.24,29.1) v1(44.24,26.56) v1(44.24,24.02) v1(44.24,21.48) v1(44.24,18.94) v1(44.24,16.4) v1(44.24,15.48) v1(44.24,13.87) v1(44.24,13.86) v1(44.24,12.94) v1(44.95,74.72) v1(45.85,10.98) v1(45.97,114.55) v1(45.97,106.93) v1(45.97,99.31) v1(45.97,91.69) v1(45.97,84.07) v1(45.97,76.45) v1(45.93,73.65) v1(45.93,71.11) v1(45.97,68.83) v1(45.93,66.03) v1(45.93,63.49) v1(45.97,61.21) v1(45.93,58.41) v1(45.93,55.87) v1(45.97,53.59) v1(45.93,50.79) v1(45.93,48.25) v1(45.97,45.97) v1(45.93,43.17) v1(45.93,40.63) v1(45.97,38.35) v1(45.93,35.55) v1(45.93,33.01) v1(45.97,30.73) v1(45.93,27.93) v1(45.93,25.39) v1(45.97,23.11) v1(45.93,20.31) v1(45.93,17.77) v1(45.93,15.23) v1(45.97,7.87) v1(46.78,35.12) v1(46.78,32.58) v1(46.78,30.04) v1(46.78,27.5) v1(46.78,24.96) v1(46.78,22.42) v1(46.78,19.88) v1(46.92,73.45) v1(46.99,6.35) v1(47.33,13.17) v1(47.36,13.13) v1(47.46,75.14) v1(47.62,4.45) v1(47.71,37.48) v1(47.78,17.37) v1(48.47,35.06) v1(48.47,32.52) v1(48.47,29.98) v1(48.47,27.44) v1(48.47,24.9) v1(48.47,22.36) v1(48.47,19.82) v1(48.89,2.54) v1(49.32,72.62) v1(49.32,70.08) v1(49.32,67.54) v1(49.32,65) v1(49.32,62.46) v1(49.32,34.25) v1(49.32,31.71) v1(49.32,29.17) v1(49.32,26.63) v1(49.99,75.02) v1(49.94,59.99) v1(50.19,38.05) v1(50.73,36.21) v1(50.8,2.54) v1(51.01,72.69) v1(51.01,70.15) v1(51.01,67.61) v1(51.01,65.07) v1(51.01,62.53) v1(51.01,30.85) v1(51.01,28.31) v1(51.23,9.96) v1(51.36,35.77) v1(51.41,25.19) v1(51.86,82.88) v1(51.86,80.34) v1(51.86,33.24) v1(51.98,39.84) v1(52.2,58.85) v1(52.4,77.85) v1(52.48,30.78) v1(52.58,60.53) v1(52.53,38) v1(52.7,2.54) v1(52.85,14.68) v1(53.39,29.19) v1(53.59,114.55) v1(53.59,106.93) v1(53.59,91.69) v1(53.55,80.27) v1(53.59,61.21) v1(53.59,53.59) v1(53.59,38.35) v1(53.55,34.49) v1(53.66,84.66) v1(53.83,31.96) v1(53.83,25.96) v1(53.97,97.16) v1(53.97,95.89) v1(53.97,71.75) v1(53.97,70.48) v1(53.97,46.35) v1(53.97,45.09) v1(53.97,20.95) v1(53.97,19.68) v1(54.1,82.75) v1(54.19,76.06) v1(54.32,40.85) v1(54.4,34.43) v1(54.66,77.98) v1(54.7,58.4) v1(54.65,16.47) v1(54.61,2.54) v1(54.79,39.16) v1(54.97,30.28) v1(55.04,93.98) v1(55.04,91.44) v1(55.04,73.66) v1(55.04,55.88) v1(55.04,53.34) v1(55.04,50.8) v1(55.04,48.26) v1(55.04,25.58) v1(55.04,23.04) v1(55.11,60.38) v1(55.25,98.42) v1(55.25,69.22) v1(55.25,43.81) v1(55.25,18.41) v1(55.32,40.84) v1(55.66,27.73) v1(55.83,89.03) v1(55.92,29.42) v1(56.2,84.66) v1(56.45,76.18) v1(56.52,98.42) v1(56.52,69.22) v1(56.52,43.81) v1(56.56,35.77) v1(56.52,18.41) v1(56.52,2.54) v1(56.63,82.98) v1(56.72,93.98) v1(56.72,91.44) v1(56.72,73.66) v1(56.72,58.42) v1(56.72,55.88) v1(56.72,53.34) v1(56.72,50.8) v1(56.72,48.26) v1(56.72,25.63) v1(56.72,23.09) v1(56.83,66.04) v1(56.86,40.85) v1(56.94,31.89) v1(57.33,39.16) v1(57.42,2.93) v1(57.62,87.23) v1(57.78,97.16) v1(57.78,95.89) v1(57.78,71.75) v1(57.78,70.48) v1(57.78,46.35) v1(57.78,45.09) v1(57.78,20.95) v1(57.78,19.68) v1(57.88,14.14) v1(58,89.24) v1(58.11,27.06) v1(58.44,29.11) v1(58.49,24.91) v1(58.58,11.22) v1(58.63,34.3) v1(58.74,84.66) v1(58.9,30.27) v1(58.99,82.05) v1(59.06,8.89) v1(59.4,40.85) v1(59.42,85.44) v1(59.63,31.96) v1(59.69,1.78) v1(59.79,87.45) v1(59.87,39.16) v1(59.83,28.93) v1(59.9,27.03) v1(60.38,11) v1(60.55,82.88) v1(60.51,9.32) v1(60.71,38.35) v1(60.71,7.87) v1(60.79,80.26) v1(60.75,36.78) v1(60.75,34.24) v1(60.72,16.79) v1(61.12,11.22) v1(61.21,114.55) v1(61.21,106.93) v1(61.21,99.31) v1(61.21,91.69) v1(61.21,83.64) v1(61.21,76.45) v1(61.21,68.83) v1(61.21,61.21) v1(61.21,53.59) v1(61.21,45.97) v1(61.21,23.11) v1(61.43,30.4) v1(61.59,85.65) v1(61.87,40.29) v1(61.9,18.01) v1(62.14,15.71) v1(62.15,15.71) v1(62.23,8.89) v1(62.23,1.78) v1(62.35,81.09) v1(62.34,12.74) v1(62.44,37.81) v1(62.44,35.27) v1(62.44,32.73) v1(62.59,78.46) v1(63.01,81.84) v1(62.96,16.69) v1(62.92,11) v1(63.05,9.32) v1(63.29,76.02) v1(63.29,73.48) v1(63.29,70.94) v1(63.29,68.4) v1(63.29,65.86) v1(63.29,63.32) v1(63.29,60.78) v1(63.29,58.24) v1(63.29,55.7) v1(63.29,53.16) v1(63.29,50.62) v1(63.29,48.08) v1(63.29,45.54) v1(63.29,43) v1(63.29,40.46) v1(63.29,37.92) v1(63.29,35.38) v1(63.29,32.84) v1(63.29,30.3) v1(63.29,27.76) v1(63.29,25.22) v1(63.29,22.68) v1(63.29,20.14) v1(63.39,83.86) v1(63.66,11.22) v1(63.93,17.51) v1(64.15,79.29) v1(64.14,6.99) v1(64.14,5.08) v1(64.29,15.47) v1(64.29,14.66) v1(64.26,14.66) v1(64.81,80.05) v1(64.77,3.47) v1(64.77,1.78) v1(64.89,18.34) v1(64.86,12.87) v1(64.87,12.87) v1(64.98,76.89) v1(64.98,74.35) v1(64.98,71.81) v1(64.98,69.27) v1(64.98,66.73) v1(64.98,64.19) v1(64.98,61.65) v1(64.98,59.11) v1(64.98,56.57) v1(64.98,54.03) v1(64.98,51.49) v1(64.98,48.95) v1(64.98,46.41) v1(64.98,43.87) v1(64.98,41.33) v1(64.98,38.79) v1(64.98,36.25) v1(64.98,33.71) v1(64.98,31.17) v1(64.98,28.63) v1(64.98,26.09) v1(64.98,23.55) v1(64.98,21.01) v1(65.18,82.06) v1(65.46,11) v1(65.59,9.32) v1(65.73,19.3) v1(65.83,77.72) v1(65.83,75.18) v1(65.83,72.64) v1(65.83,70.1) v1(65.83,67.56) v1(65.83,65.02) v1(65.83,62.48) v1(65.83,59.94) v1(65.83,57.4) v1(65.83,54.86) v1(65.83,52.32) v1(65.83,49.78) v1(65.83,47.24) v1(65.83,44.7) v1(65.83,42.16) v1(65.83,39.62) v1(65.83,37.08) v1(65.83,34.54) v1(65.83,32) v1(65.83,29.46) v1(65.83,26.92) v1(65.83,24.38) v1(65.83,21.84) v1(66.08,17.27) v1(66.06,16.46) v1(66.2,11.22) v1(66.58,13.8) v1(66.66,14.66) v1(66.66,13.82) v1(66.98,80.26) v1(67.52,77.78) v1(67.52,75.24) v1(67.52,72.7) v1(67.52,70.16) v1(67.52,67.62) v1(67.52,65.08) v1(67.52,62.54) v1(67.52,60) v1(67.52,57.46) v1(67.52,54.92) v1(67.52,52.38) v1(67.52,49.84) v1(67.52,47.3) v1(67.52,44.76) v1(67.52,42.22) v1(67.52,39.68) v1(67.52,37.14) v1(67.52,34.6) v1(67.52,32.06) v1(67.52,29.52) v1(67.52,26.98) v1(67.52,24.44) v1(67.52,21.9) v1(67.52,19.36) v1(67.86,18.25) v1(67.97,11.38) v1(68.09,12.92) v1(68.13,9.32) v1(68.33,84.07) v1(68.37,81.7) v1(68.37,79.16) v1(68.33,76.45) v1(68.37,74.08) v1(68.37,71.54) v1(68.33,68.83) v1(68.37,66.46) v1(68.37,63.92) v1(68.37,61.38) v1(68.37,58.84) v1(68.37,56.3) v1(68.37,53.76) v1(68.37,51.22) v1(68.37,48.68) v1(68.37,46.14) v1(68.37,43.6) v1(68.37,41.06) v1(68.37,38.52) v1(68.37,35.98) v1(68.37,33.44) v1(68.37,30.9) v1(68.37,28.36) v1(68.37,25.82) v1(68.33,23.11) v1(68.37,20.74) v1(68.38,15.6) v1(68.45,16.46) v1(68.83,114.55) v1(68.83,106.93) v1(68.83,99.31) v1(68.83,91.69) v1(68.83,7.87) v1(69.52,1.78) v1(69.77,13.17) v1(69.86,83.76) v1(69.88,14.72) v1(70.01,11.03) v1(70.06,79.39) v1(70.06,76.85) v1(70.06,74.31) v1(70.06,71.77) v1(70.06,69.23) v1(70.06,66.69) v1(70.06,64.15) v1(70.06,61.61) v1(70.06,59.07) v1(70.06,56.53) v1(70.06,53.99) v1(70.06,51.45) v1(70.06,48.91) v1(70.06,46.37) v1(70.06,43.83) v1(70.06,41.29) v1(70.06,38.75) v1(70.06,36.21) v1(70.06,33.67) v1(70.06,31.13) v1(70.06,28.59) v1(70.06,26.05) v1(70.06,23.51) v1(70.06,20.97) v1(70.06,18.43) v1(70.17,17.39) v1(70.4,81.9) v1(70.34,3.47) v1(70.91,78.24) v1(70.91,75.7) v1(70.91,73.16) v1(70.91,70.62) v1(70.91,68.08) v1(70.91,65.54) v1(70.91,63) v1(70.91,60.46) v1(70.91,57.92) v1(70.91,55.38) v1(70.91,52.84) v1(70.91,50.3) v1(70.91,47.76) v1(70.91,45.22) v1(70.91,42.68) v1(70.91,40.14) v1(70.91,37.6) v1(70.91,35.06) v1(70.91,32.52) v1(70.91,29.98) v1(70.91,27.44) v1(70.91,24.9) v1(70.91,22.36) v1(70.91,19.82) v1(71.31,80.75) v1(71.56,14.97) v1(71.66,85.55) v1(71.68,16.51) v1(71.8,12.82) v1(72.06,1.78) v1(72.19,83.7) v1(72.6,77.3) v1(72.6,74.76) v1(72.6,72.22) v1(72.6,69.68) v1(72.6,67.14) v1(72.6,64.6) v1(72.6,62.06) v1(72.6,59.52) v1(72.6,56.98) v1(72.6,54.44) v1(72.6,51.9) v1(72.6,49.36) v1(72.6,46.82) v1(72.6,44.28) v1(72.6,41.74) v1(72.6,39.2) v1(72.6,36.66) v1(72.6,34.12) v1(72.6,31.58) v1(72.6,29.04) v1(72.6,26.5) v1(72.6,23.96) v1(72.6,21.42) v1(72.6,18.88) v1(72.82,11.67) v1(72.82,9.13) v1(72.82,6.59) v1(72.82,4.05) v1(73.05,79.8) v1(73.36,16.77) v1(73.45,62.49) v1(73.45,59.95) v1(73.45,57.41) v1(73.45,54.87) v1(73.45,52.33) v1(73.45,49.79) v1(73.45,47.25) v1(73.45,44.71) v1(73.45,42.17) v1(73.45,39.63) v1(73.45,37.09) v1(73.45,34.55) v1(73.45,32.01) v1(73.45,29.47) v1(73.45,26.93) v1(73.45,24.39) v1(73.45,21.85) v1(73.45,19.31) v1(73.59,87.2) v1(73.6,14.62) v1(73.74,81.49) v1(73.99,85.5) v1(74.2,13.8) v1(74.43,64.83) v1(74.5,10.36) v1(74.5,7.82) v1(74.5,5.28) v1(74.42,2.74) v1(75.14,62.36) v1(75.14,59.82) v1(75.14,57.28) v1(75.14,54.74) v1(75.14,52.2) v1(75.14,49.66) v1(75.14,47.12) v1(75.14,44.58) v1(75.14,42.04) v1(75.14,39.5) v1(75.14,36.96) v1(75.14,34.42) v1(75.14,31.88) v1(75.14,29.34) v1(75.14,26.8) v1(75.14,24.26) v1(75.14,21.72) v1(75.14,19.18) v1(75.14,16.64) v1(75.49,12.7) v1(75.59,79.8) v1(75.95,106.93) v1(76,87.99) v1(75.99,38.46) v1(75.99,35.92) v1(75.99,33.38) v1(75.99,30.84) v1(75.99,28.3) v1(75.99,25.76) v1(75.99,23.22) v1(75.99,20.68) v1(75.99,18.14) v1(75.99,15.6) v1(75.95,7.87) v1(76.28,81.49) v1(76.45,114.55) v1(76.45,99.31) v1(76.45,91.69) v1(76.47,86.07) v1(76.45,84.07) v1(76.45,76.45) v1(76.45,68.83) v1(76.45,61.21) v1(76.45,53.59) v1(76.45,45.97) v1(76.57,40.93) v1(76.96,64.98) v1(77.28,14.49) v1(77.5,63.29) v1(77.68,37.32) v1(77.68,34.78) v1(77.68,32.24) v1(77.68,29.7) v1(77.68,27.16) v1(77.68,24.62) v1(77.68,19.54) v1(77.8,89.79) v1(78.13,79.8) v1(78.26,87.86) v1(78.26,39.8) v1(78.53,60.23) v1(78.53,37.55) v1(78.58,30.72) v1(78.53,27.52) v1(78.82,81.49) v1(79.05,41.48) v1(79.01,33.22) v1(79.16,25.06) v1(79.26,35.12) v1(79.27,16.12) v1(79.38,97.16) v1(79.38,95.89) v1(79.38,71.75) v1(79.38,70.48) v1(79.4,57.84) v1(79.38,46.35) v1(79.38,45.09) v1(79.38,20.95) v1(79.38,19.68) v1(79.5,64.98) v1(79.59,91.58) v1(80.06,89.66) v1(80.04,63.29) v1(80.27,66.39) v1(80.44,93.98) v1(80.44,78.74) v1(80.44,76.2) v1(80.44,73.66) v1(80.44,52.1) v1(80.44,49.56) v1(80.44,22.86) v1(80.52,61.8) v1(80.64,98.42) v1(80.64,69.22) v1(80.64,43.81) v1(80.65,38.94) v1(80.64,18.41) v1(80.73,54.62) v1(80.8,39.8) v1(80.73,28.78) v1(80.88,29.64) v1(81.31,36.4) v1(81.33,81.15) v1(81.47,33.86) v1(81.59,41.48) v1(81.54,31.32) v1(81.77,56.94) v1(81.85,91.46) v1(81.85,25.38) v1(81.91,98.42) v1(81.91,69.22) v1(81.91,43.81) v1(81.91,18.41) v1(82.04,64.98) v1(82.12,93.98) v1(82.12,78.74) v1(82.12,76.2) v1(82.12,73.66) v1(82.12,51.35) v1(82.12,48.81) v1(82.12,22.86) v1(82.58,63.29) v1(82.58,60.12) v1(82.91,53.77) v1(83.19,97.16) v1(83.19,95.89) v1(83.19,71.75) v1(83.19,70.48) v1(83.19,46.35) v1(83.19,45.09) v1(83.19,38.94) v1(83.19,20.95) v1(83.19,19.68) v1(83.27,28.78) v1(83.7,37.26) v1(83.73,27.1) v1(83.85,36.4) v1(83.94,32.18) v1(84.07,114.55) v1(84.07,91.69) v1(84.07,84.07) v1(84.07,76.45) v1(84.09,58.08) v1(84.07,53.59) v1(84.08,31.32) v1(84.07,15.49) v1(84.13,41.48) v1(84.42,64.09) v1(84.66,61.56) v1(84.66,55.6) v1(85.3,39.23) v1(85.3,34.32) v1(85.3,29.09) v2(23.5,7.62) v2(23.5,6.99) v2(24.13,12.06) v2(24.13,11.43) v2(28.57,12.7) v2(29.21,12.7) v2(31.11,13.34) v2(31.11,12.7) v2(32.39,13.34) v2(32.39,12.7) v2(34.29,13.34) v2(34.29,12.7) v2(35.56,13.34) v2(35.56,12.7) v2(48.26,13.34) v2(48.26,12.7) v2(49.53,13.34) v2(49.53,12.7) v2(52.07,13.34) v2(52.07,12.7) v2(54.23,13.34) v2(54.23,12.7) v2(57.15,12.7) v2(57.78,12.7) v2(67.31,6.99) v2(67.31,6.35)
N17882: length 106.6
  TOP w0.165: U1.1 7.62,64.77 8.26,65.41 12.7,65.41 13.34,66.04 13.34,72.86 14.14,73.66 15.71,73.66 16.51,72.86 16.51,17.78 23.5,10.79 24.36,10.79 25.4,9.76 R4.2 25.4,8.2 25.94,7.66 25.94,7.66 J1.11
N17894: length 106.4
  BOTTOM w0.165: U3.1 7.62,83.19 9.52,85.09 17.14,85.09 19.05,83.19 19.05,18.41 26.27,11.2 27.77,11.2 29.21,9.76 R3.2 J1.9
N17906: length 106.4
  BOTTOM w0.165: U5.1 27.94,96.52 26.67,97.79 23.5,97.79 20.95,95.25 20.95,93.98 24.13,90.81 24.13,19.05 30.48,12.7 30.48,11.03 31.75,9.76 R2.2 J1.7
N17918: length 106.4
  BOTTOM w0.165: U7.1 33.02,51.44 38.73,57.15 38.73,73.02 39.37,73.66 41.28,73.66 42.55,72.39 42.55,19.68 38.1,15.24 34.29,15.24 33.02,13.97 33.02,11.03 34.29,9.76 R1.2 J1.5
N17930: length 106.3
  BOTTOM w0.165: U2.1 7.62,24.77 6.99,25.4 5.71,25.4 5.08,26.04 5.08,27.3 5.71,27.94 6.99,27.94 7.62,28.57 7.62,29.84 6.99,30.48 5.71,30.48 5.08,31.11 5.08,32.38 5.71,33.02 6.99,33.02 7.62,33.66 7.62,34.92 6.99,35.56 5.71,35.56 5.08,36.2 5.08,37.47 5.71,38.1 6.99,38.1 7.62,38.73 7.62,39.37 8.26,40.01 13.34,40.01 13.97,39.37 13.97,38.1 13.34,37.47 11.43,37.47 10.79,36.83 10.79,35.56 11.43,34.92 13.34,34.92 13.97,34.29 13.97,33.02 13.34,32.38 11.43,32.38 10.79,31.75 10.79,30.48 11.43,29.84 13.34,29.84 13.97,29.21 13.97,3.17 14.61,2.54 16.51,2.54 17.14,3.17 17.14,8.89 18.41,10.16 20.95,10.16 22.23,8.89 22.23,5.71 23.41,4.53 R5.2 26.53,4.53 J1.12
N17948: length 106.2
  TOP w0.165: U4.1 14.61,96.52 21.59,89.53 21.59,18.65 30.48,9.76 R6.2 30.48,5.66 J1.10
N17973: length 106.5
  TOP w0.165: U6.1 33.02,85.72 31.75,87 27.94,87 26.67,85.72 26.67,19.05 31.75,13.97 31.75,11.04 33.02,9.77 R7.2 33.02,5.66 J1.8
N17998: length 106.5
  TOP w0.165: J1.6 35.55,5.65 35.55,7.05 35.56,7.06 R8.2 35.56,9.77 40,14.21 40,40.64 38.73,41.91 38.1,41.91 36.2,40.01 30.48,40.01 29.21,38.73 29.21,33.02 29.84,32.38 31.11,32.38 31.75,33.02 31.75,36.2 32.39,36.83 33.02,36.83 33.66,36.2 33.66,33.02 34.29,32.38 34.92,32.38 35.56,33.02 35.56,36.2 36.2,36.83 36.83,36.83 37.47,36.2 37.47,27.3 36.83,26.67 34.92,26.67 34.29,27.3 34.29,29.21 33.66,29.84 30.48,29.84 29.84,29.21 29.84,27.94 33.02,24.77 U8.1
